# EAGLE board zulu_a7.c3s (EAGLE 9.7.0), part 1 of 3
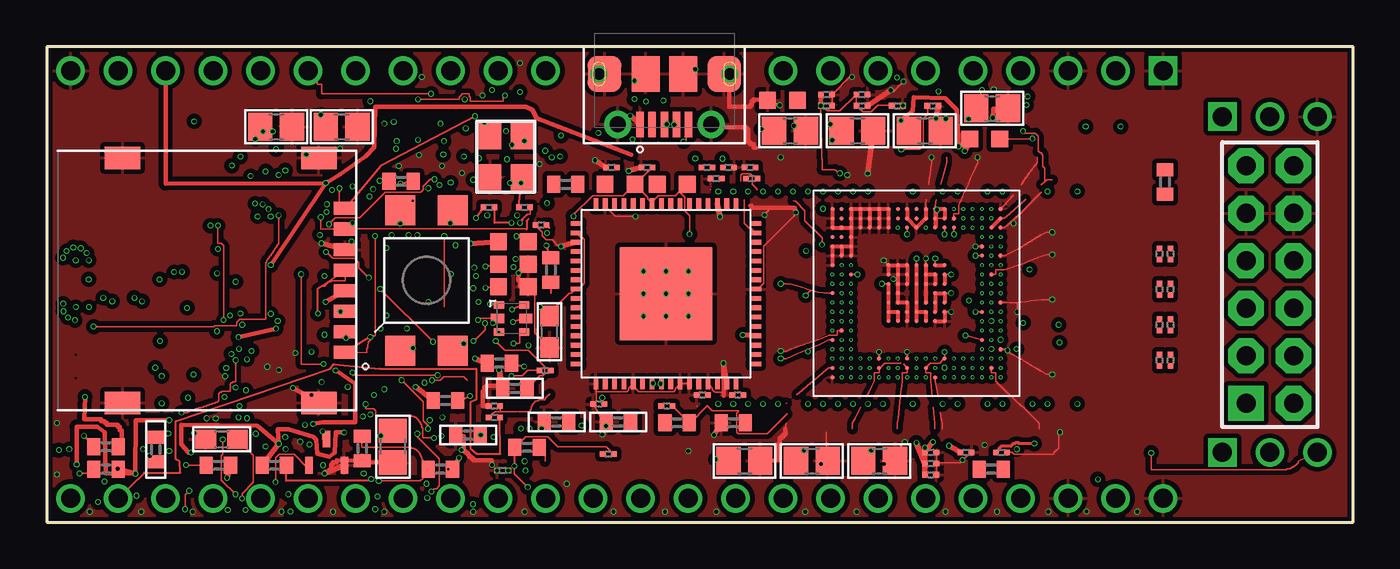
[diagram p0: board, top side]
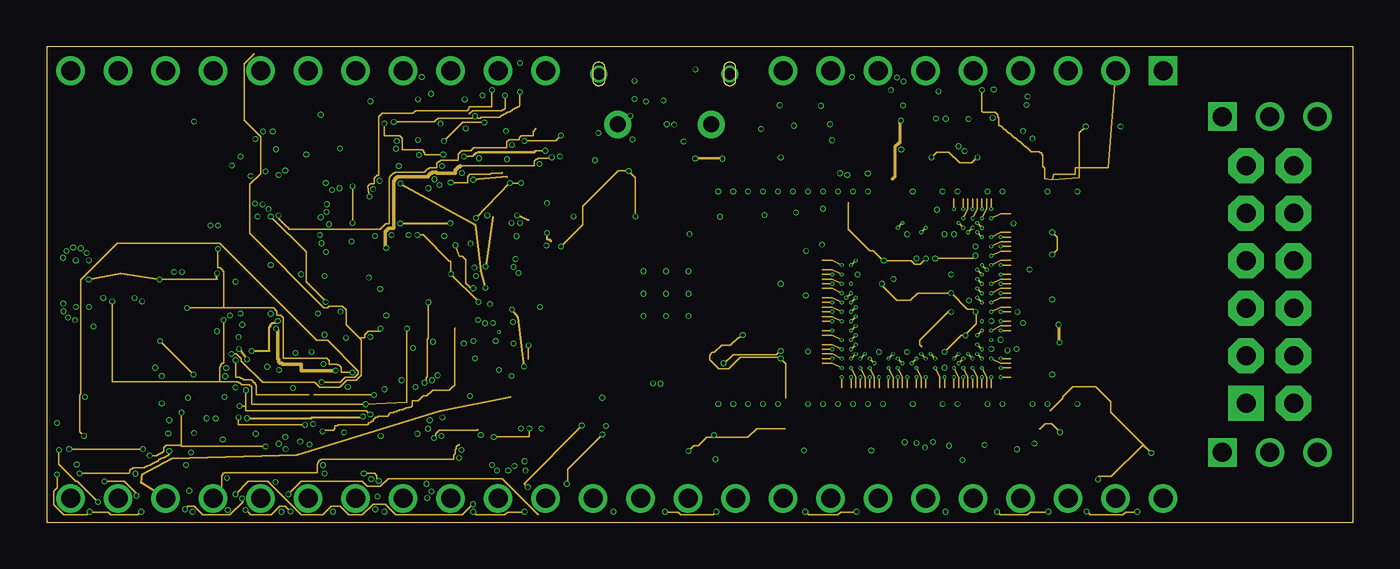
[diagram p1: board, inner layer Route2]
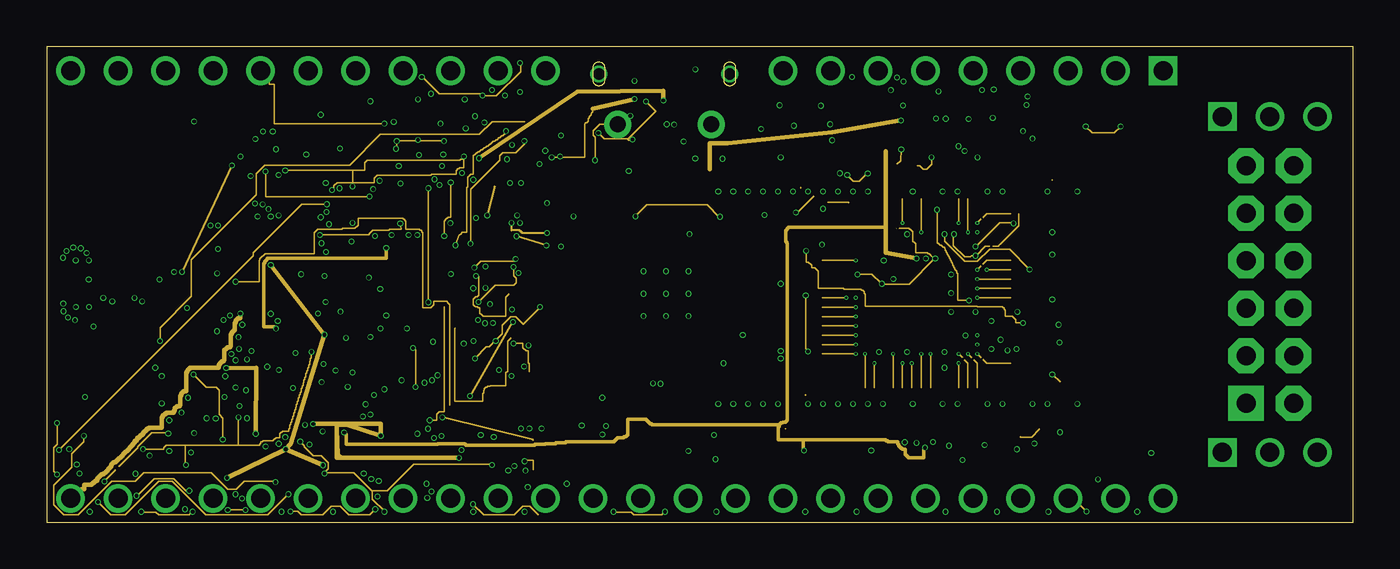
[diagram p2: board, inner layer Route3]
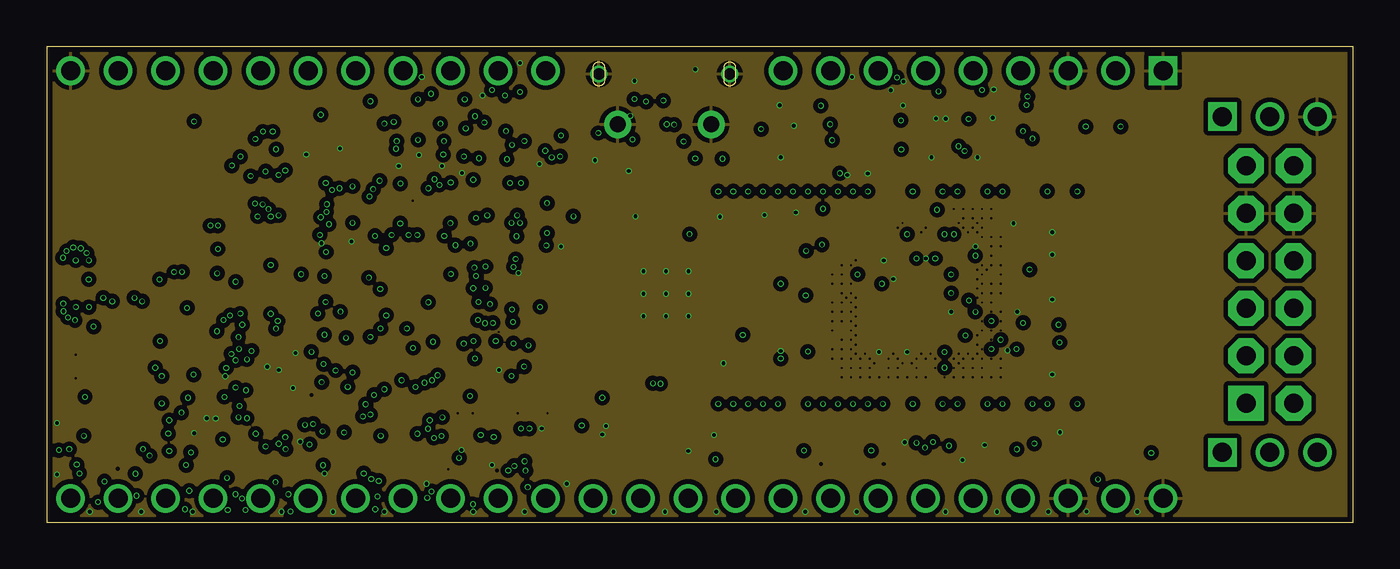
[diagram p3: board, inner layer Route4]
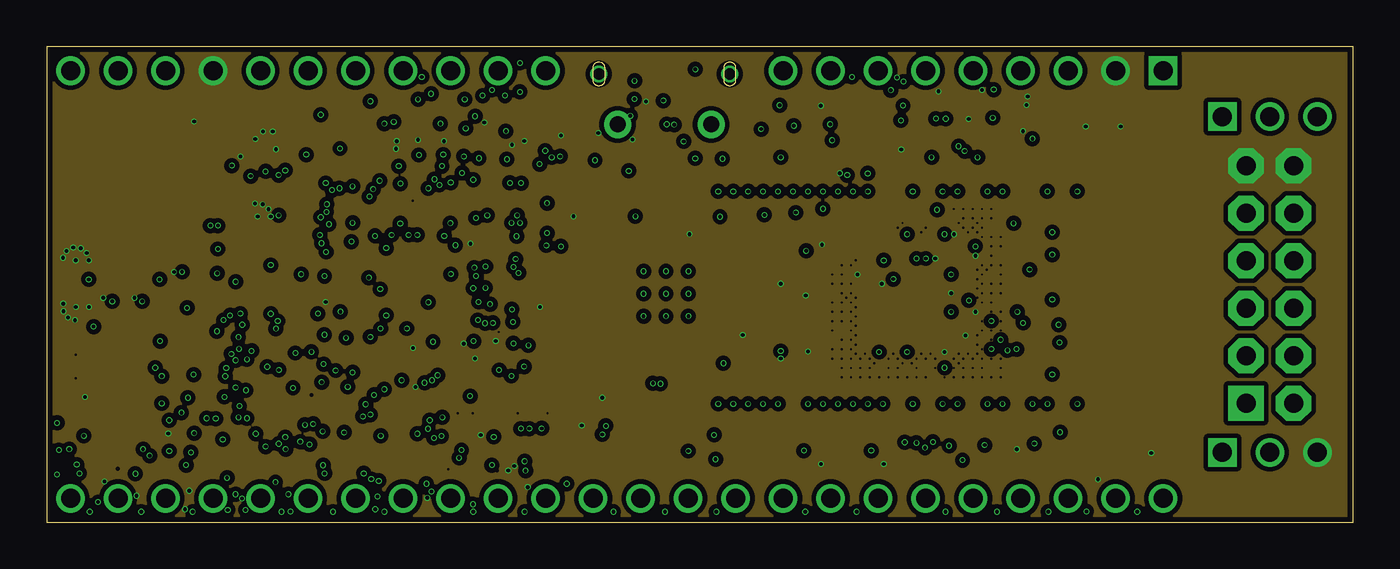
[diagram p4: board, inner layer Route5]
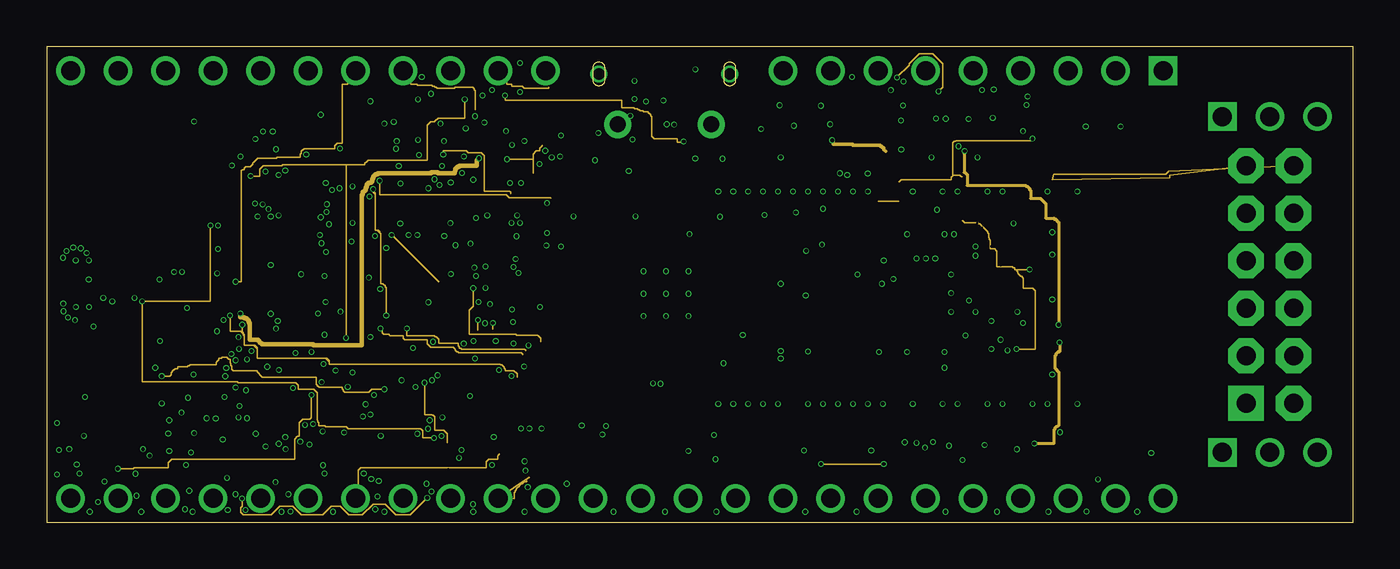
[diagram p5: board, inner layer Route6]
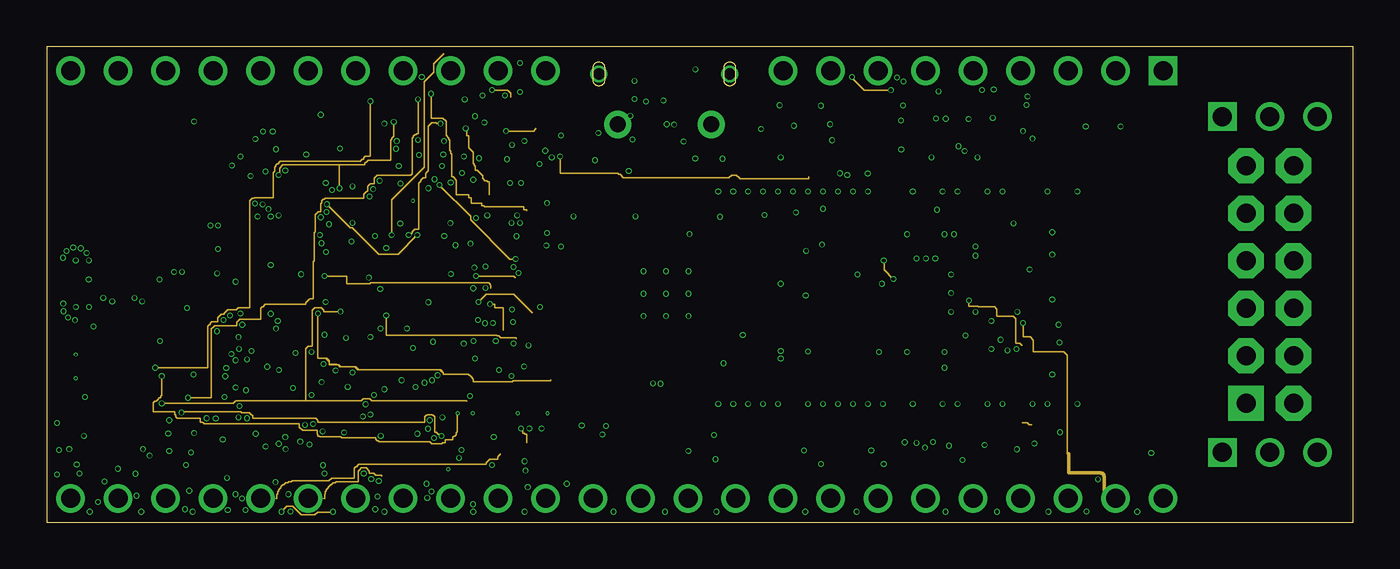
[diagram p6: board, inner layer Route7]
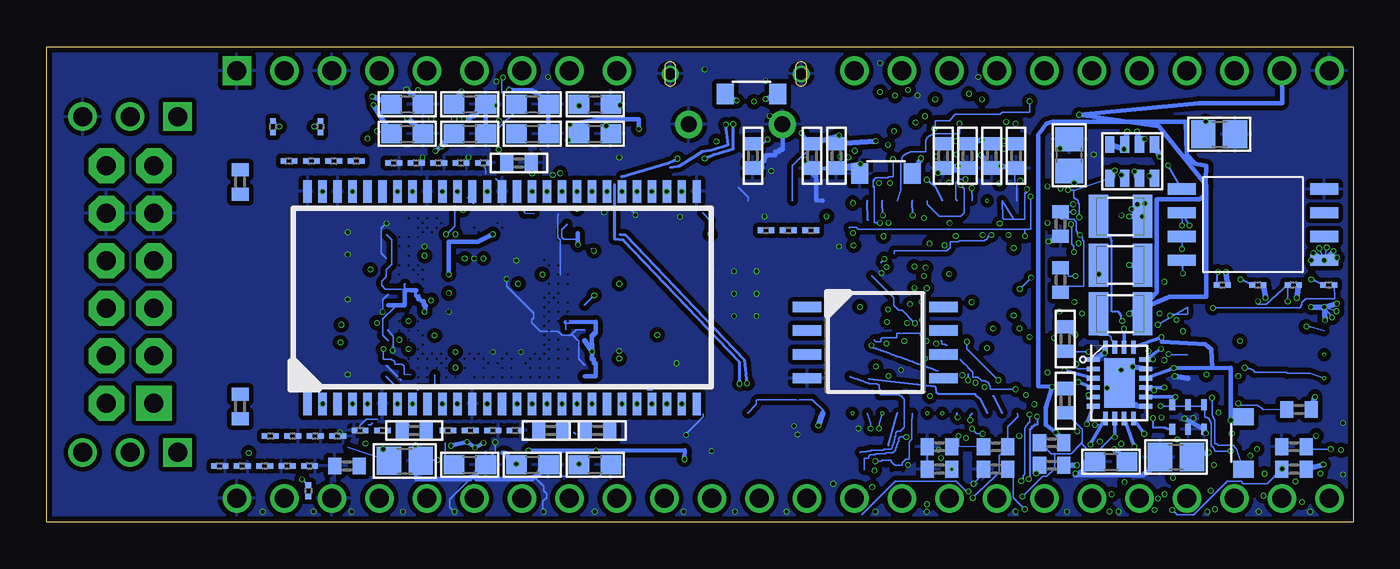
[diagram p7: board, bottom side, seen from below]

Size 69.85 x 25.4 mm. Coordinates in mm from the lower left corner, seen from the top.
Outline: 0,0 69.85,0 69.85,25.4 0,25.4 0,0
Copper layers [3:1+2+((3*4)+(5*6))+7+16:7]: Top / Route2 / Route3 / Route4 / Route5 / Route6 / Route7 / Bottom
Stack-up Default Layer Stack: Top User Defined 0.035mm / Dielectric-1 User Defined 0.12mm / Route2 User Defined 0.018mm / Dielectric-2 User Defined 0.2mm / Route3 User Defined 0.018mm / Dielectric-3 User Defined 0.25mm / Route4 User Defined 0.018mm / Dielectric-4 User Defined 0.282mm / Route5 User Defined 0.018mm / Dielectric-5 User Defined 0.25mm / Route6 User Defined 0.018mm / Dielectric-6 User Defined 0.2mm / Route7 User Defined 0.018mm / Dielectric-7 User Defined 0.12mm / Bottom User Defined 0.035mm
Design rules: minimum copper width class=2 0.15mm, minimum copper width 3mil, minimum drill size 0.1mm, copper clearance class=1 to class=1 10mil, copper clearance class=2 to class=2 3mil, copper clearance class=0 to class=0 3mil, copper clearance wire_polygon to wire_polygon 3mil, copper clearance wire_polygon to pad_smd 3mil, copper clearance wire_polygon to via 3mil, copper clearance pad_smd to pad_smd 3mil, copper clearance pad_smd to via 3mil, copper clearance via to via 3mil, copper clearance smd to pad (same net) 3mil, copper clearance smd to smd (same net) 3mil, copper clearance smd to via (same net) 0mil, dimension clearance 0.3mm, via restrict clearance 0mil, restrict clearance 0mil, drill distance 0.2mm, keepout clearance 0mil
Net classes: 0 default: clearance 0.076 mm; 1 power: clearance 0.254 mm; 2 usb-diff: width 0.15 mm, clearance 0.076 mm

## Footprints (pad centres in the part's own frame; a part is rotated, then mirrored left to right if it is on the bottom)
PTA-142 = smd 1.6 x 1.6: 1 -3.75,1.4; 2 -3.75,-1.4; 3 3.75,-1.4; 4 3.75,1.4
C0402 = smd 0.7 x 0.9: 1 -0.65,0; 2 0.65,0
C0603 = smd 1.1 x 1: 1 -0.85,0; 2 0.85,0
C0201 = smd 0.3 x 0.3: 1 -0.3,0; 2 0.3,0
C0805 = smd 1.3 x 1.5: 1 -0.85,0; 2 0.85,0
SOD123 = smd 0.9 x 1.1: A -1.4,0; K 1.4,0
2X06 = drill 1.016 pad 1.88 square: 1 -6.35,1.27 | drill 1.016 pad 1.88 octagon: 2 -3.81,1.27; 3 -1.27,1.27; 4 1.27,1.27; 5 3.81,1.27; 6 6.35,1.27; 7 -6.35,-1.27; 8 -3.81,-1.27; 9 -1.27,-1.27; 10 1.27,-1.27; 11 3.81,-1.27; 12 6.35,-1.27
1X03-NOSILK = drill 1.016 square: 1 -2.54,0 | drill 1.016: 2 0,0; 3 2.54,0
IND2520 = smd 1.05 x 2.3: 1 -1.175,0; 2 1.175,0
IND0603 = smd 0.9 x 0.9: 1 -0.8,0; 2 0.8,0
VS-NRD8 = smd 0.55 x 0.4: 1 -0.675,0.725; 3 -0.675,-0.725; 4 0.675,0.725; 6 0.675,-0.725 | smd 0.7 x 0.5: 2 -0.75,0; 5 0.75,0
LED0603 = smd 0.9 x 0.9: A -0.8,0; K 0.8,0
32X25 = smd 1.2 x 1.4: 1 0,0; 2 0,-2.2; 3 1.7,-2.2; 4 1.7,0
SOT23-3 = smd 0.4 x 0.9: D 0,0.7; G -0.95,-0.7; S 0.95,-0.7
SOT363 = smd 0.3 x 0.6: 1 -0.85,-0.65; 2 0,-0.65; 3 0.85,-0.65; 4 0.85,0.65; 5 0,0.65; 6 -0.85,0.65
R0201 = smd 0.3 x 0.3: 1 -0.3,0; 2 0.3,0
R0402 = smd 0.7 x 0.9: 1 -0.65,0; 2 0.65,0
742C083 = smd 0.5 x 0.9: 1 -0.4,-0.9; 2 0.4,-0.9; 3 1.2,-0.9; 4 2,-0.9; 5 2,0.9; 6 1.2,0.9; 7 0.4,0.9; 8 -0.4,0.9
XC7A35T-CPG236 = smd 0.225 x 0.225: A1 0,0; A2 0.5,0; A3 1,0; A4 1.5,0; A5 2,0; A6 2.5,0; A7 3,0; A8 3.5,0; A9 4,0; A10 4.5,0; A11 5,0; A12 5.5,0; A13 6,0; A14 6.5,0; A15 7,0; A16 7.5,0; A17 8,0; A18 8.5,0; A19 9,0; B1 0,-0.5; B2 0.5,-0.5; B3 1,-0.5; B4 1.5,-0.5; B5 2,-0.5; B6 2.5,-0.5; B7 3,-0.5; B8 3.5,-0.5; B9 4,-0.5; B10 4.5,-0.5; B11 5,-0.5; B12 5.5,-0.5; B13 6,-0.5; B14 6.5,-0.5; B15 7,-0.5; B16 7.5,-0.5; B17 8,-0.5; B18 8.5,-0.5; B19 9,-0.5; C1 0,-1; C2 0.5,-1; C3 1,-1; C4 1.5,-1; C5 2,-1; C6 2.5,-1; C7 3,-1; C8 3.5,-1; C9 4,-1; C10 4.5,-1; C11 5,-1; C12 5.5,-1; C13 6,-1; C14 6.5,-1; C15 7,-1; C16 7.5,-1; C17 8,-1; C18 8.5,-1; C19 9,-1; D1 0,-1.5; D2 0.5,-1.5; D3 1,-1.5; D17 8,-1.5; D18 8.5,-1.5; D19 9,-1.5; E1 0,-2; E2 0.5,-2; E3 1,-2; E17 8,-2; E18 8.5,-2; E19 9,-2; F1 0,-2.5; F2 0.5,-2.5; F3 1,-2.5; F17 8,-2.5; F18 8.5,-2.5; F19 9,-2.5; G1 0,-3; G2 0.5,-3; G3 1,-3; G7 3,-3; G8 3.5,-3; G9 4,-3; G10 4.5,-3; G11 5,-3; G12 5.5,-3; G13 6,-3; G17 8,-3; G18 8.5,-3; G19 9,-3; H1 0,-3.5; H2 0.5,-3.5; H3 1,-3.5; H7 3,-3.5; H8 3.5,-3.5; H9 4,-3.5; H10 4.5,-3.5; H11 5,-3.5; H12 5.5,-3.5; H13 6,-3.5; H17 8,-3.5; H18 8.5,-3.5; H19 9,-3.5; J1 0,-4; J2 0.5,-4; J3 1,-4; J7 3,-4; J8 3.5,-4; J9 4,-4; J10 4.5,-4; J11 5,-4; J12 5.5,-4; J13 6,-4; J17 8,-4; J18 8.5,-4; J19 9,-4; K1 0,-4.5; K2 0.5,-4.5; K3 1,-4.5; K7 3,-4.5; K8 3.5,-4.5; K12 5.5,-4.5; K13 6,-4.5; K17 8,-4.5; K18 8.5,-4.5; K19 9,-4.5; L1 0,-5; L2 0.5,-5; L3 1,-5; L7 3,-5; L8 3.5,-5; L9 4,-5; L10 4.5,-5; L11 5,-5; L12 5.5,-5; L13 6,-5; L17 8,-5; L18 8.5,-5; L19 9,-5; M1 0,-5.5; M2 0.5,-5.5; M3 1,-5.5; M7 3,-5.5; M8 3.5,-5.5; M9 4,-5.5; M10 4.5,-5.5; M11 5,-5.5; M12 5.5,-5.5; M13 6,-5.5; M17 8,-5.5; M18 8.5,-5.5; M19 9,-5.5; N1 0,-6; N2 0.5,-6; N3 1,-6; N7 3,-6; N8 3.5,-6; N9 4,-6; N10 4.5,-6; N11 5,-6; N12 5.5,-6; N13 6,-6; N17 8,-6; N18 8.5,-6; N19 9,-6; P1 0,-6.5; P2 0.5,-6.5; P3 1,-6.5; P17 8,-6.5; P18 8.5,-6.5; P19 9,-6.5; R1 0,-7; R2 0.5,-7; R3 1,-7; R17 8,-7; R18 8.5,-7; R19 9,-7; T1 0,-7.5; T2 0.5,-7.5; T3 1,-7.5; T17 8,-7.5; T18 8.5,-7.5; T19 9,-7.5; U1 0,-8; U2 0.5,-8; U3 1,-8; U4 1.5,-8; U5 2,-8; U6 2.5,-8; U7 3,-8; U8 3.5,-8; U9 4,-8; U10 4.5,-8; U11 5,-8; U12 5.5,-8; U13 6,-8; U14 6.5,-8; U15 7,-8; U16 7.5,-8; U17 8,-8; U18 8.5,-8; U19 9,-8; V1 0,-8.5; V2 0.5,-8.5; V3 1,-8.5; V4 1.5,-8.5; V5 2,-8.5; V6 2.5,-8.5; V7 3,-8.5; V8 3.5,-8.5; V9 4,-8.5; V10 4.5,-8.5; V11 5,-8.5; V12 5.5,-8.5; V13 6,-8.5; V14 6.5,-8.5; V15 7,-8.5; V16 7.5,-8.5; V17 8,-8.5; V18 8.5,-8.5; V19 9,-8.5; W1 0,-9; W2 0.5,-9; W3 1,-9; W4 1.5,-9; W5 2,-9; W6 2.5,-9; W7 3,-9; W8 3.5,-9; W9 4,-9; W10 4.5,-9; W11 5,-9; W12 5.5,-9; W13 6,-9; W14 6.5,-9; W15 7,-9; W16 7.5,-9; W17 8,-9; W18 8.5,-9; W19 9,-9
FT2232HQ-QFN64 = smd 0.25 x 0.6: 1 -3.75,-4.8; 2 -3.25,-4.8; 3 -2.75,-4.8; 4 -2.25,-4.8; 5 -1.75,-4.8; 6 -1.25,-4.8; 7 -0.75,-4.8; 8 -0.25,-4.8; 9 0.25,-4.8; 10 0.75,-4.8; 11 1.25,-4.8; 12 1.75,-4.8; 13 2.25,-4.8; 14 2.75,-4.8; 15 3.25,-4.8; 16 3.75,-4.8; 33 3.75,4.8; 34 3.25,4.8; 35 2.75,4.8; 36 2.25,4.8; 37 1.75,4.8; 38 1.25,4.8; 39 0.75,4.8; 40 0.25,4.8; 41 -0.25,4.8; 42 -0.75,4.8; 43 -1.25,4.8; 44 -1.75,4.8; 45 -2.25,4.8; 46 -2.75,4.8; 47 -3.25,4.8; 48 -3.75,4.8 | smd 0.6 x 0.25: 17 4.8,-3.75; 18 4.8,-3.25; 19 4.8,-2.75; 20 4.8,-2.25; 21 4.8,-1.75; 22 4.8,-1.25; 23 4.8,-0.75; 24 4.8,-0.25; 25 4.8,0.25; 26 4.8,0.75; 27 4.8,1.25; 28 4.8,1.75; 29 4.8,2.25; 30 4.8,2.75; 31 4.8,3.25; 32 4.8,3.75; 49 -4.8,3.75; 50 -4.8,3.25; 51 -4.8,2.75; 52 -4.8,2.25; 53 -4.8,1.75; 54 -4.8,1.25; 55 -4.8,0.75; 56 -4.8,0.25; 57 -4.8,-0.25; 58 -4.8,-0.75; 59 -4.8,-1.25; 60 -4.8,-1.75; 61 -4.8,-2.25; 62 -4.8,-2.75; 63 -4.8,-3.25; 64 -4.8,-3.75 | smd 4.95 x 4.95: EP 0,0
TSOPII-54 = smd 1.2 x 0.45: 1 0,0; 2 0,-0.8; 3 0,-1.6; 4 0,-2.4; 5 0,-3.2; 6 0,-4; 7 0,-4.8; 8 0,-5.6; 9 0,-6.4; 10 0,-7.2; 11 0,-8; 12 0,-8.8; 13 0,-9.6; 14 0,-10.4; 15 0,-11.2; 16 0,-12; 17 0,-12.8; 18 0,-13.6; 19 0,-14.4; 20 0,-15.2; 21 0,-16; 22 0,-16.8; 23 0,-17.6; 24 0,-18.4; 25 0,-19.2; 26 0,-20; 27 0,-20.8; 28 11.36,-20.8; 29 11.36,-20; 30 11.36,-19.2; 31 11.36,-18.4; 32 11.36,-17.6; 33 11.36,-16.8; 34 11.36,-16; 35 11.36,-15.2; 36 11.36,-14.4; 37 11.36,-13.6; 38 11.36,-12.8; 39 11.36,-12; 40 11.36,-11.2; 41 11.36,-10.4; 42 11.36,-9.6; 43 11.36,-8.8; 44 11.36,-8; 45 11.36,-7.2; 46 11.36,-6.4; 47 11.36,-5.6; 48 11.36,-4.8; 49 11.36,-4; 50 11.36,-3.2; 51 11.36,-2.4; 52 11.36,-1.6; 53 11.36,-0.8; 54 11.36,0
SOIC-8_208MIL = smd 1.51 x 0.56: 1 0.299,0; 2 0.299,-1.27; 3 0.299,-2.54; 4 0.299,-3.81; 5 7.599,-3.81; 6 7.599,-2.54; 7 7.599,-1.27; 8 7.599,0
LTC3569-QFN20 = smd 0.7 x 0.25: 1 -1.4,1.25; 2 -1.4,0.75; 3 -1.4,0.25; 4 -1.4,-0.25; 5 -1.4,-0.75; 6 -1.4,-1.25; 11 1.4,-1.25; 12 1.4,-0.75; 13 1.4,-0.25; 14 1.4,0.25; 15 1.4,0.75; 16 1.4,1.25 | smd 0.25 x 0.7: 7 -0.75,-1.9; 8 -0.25,-1.9; 9 0.25,-1.9; 10 0.75,-1.9; 17 0.75,1.9; 18 0.25,1.9; 19 -0.25,1.9; 20 -0.75,1.9 | smd 1.65 x 2.65: 21 0,0
SOIC8 = smd 1.5 x 0.6: 1 -3.81,1.905; 2 -3.81,0.635; 3 -3.81,-0.635; 4 -3.81,-1.905; 5 3.81,1.905; 6 3.81,0.635; 7 3.81,-0.635; 8 3.81,-1.905
MOLEX-105017-0001 = smd 0.4 x 1.35: 1 1.3,0; 2 0.65,0; 3 0,0; 4 -0.65,0; 5 -1.3,0 | drill 0.85 pad 1.45: MH1 -2.5,0; MH2 2.5,0 | smd 1.8 x 1.9: MP1 -3.2,2.7; MP4 3.2,2.7 | smd 1.5 x 1.9: MP2 -1,2.7; MP3 1,2.7 | drill 0.6 pad 0.9: MS1 -3.5,2.7; MS2 3.5,2.7
ZULU-DIP37 = drill 1.016 square: 1 59.69,24.13 | drill 1.016: 2 57.15,24.13; 3 54.61,24.13; 4 52.07,24.13; 5 49.53,24.13; 6 46.99,24.13; 7 44.45,24.13; 8 41.91,24.13; 9 39.37,24.13; 10 26.67,24.13; 11 24.13,24.13; 12 21.59,24.13; 13 19.05,24.13; 14 16.51,24.13; 15 13.97,24.13; 16 11.43,24.13; 17 8.89,24.13; 18 6.35,24.13; 19 3.81,24.13; 20 1.27,24.13; 21 59.69,1.27; 22 57.15,1.27; 23 54.61,1.27; 24 52.07,1.27; 25 49.53,1.27; 26 46.99,1.27; 27 44.45,1.27; 28 41.91,1.27; 29 39.37,1.27; 30 36.83,1.27; 31 34.29,1.27; 32 31.75,1.27; 33 29.21,1.27; 34 26.67,1.27; 35 24.13,1.27; 36 21.59,1.27; 37 19.05,1.27; 38 16.51,1.27; 39 13.97,1.27; 40 11.43,1.27; 41 8.89,1.27; 42 6.35,1.27; 43 3.81,1.27; 44 1.27,1.27
DM3AT-SF-PEJM5 = smd 0.7 x 1.2: 1 3.85,0; 2 2.75,0; 3 1.65,0; 4 0.55,0; 5 -0.55,0; 6 -1.65,0; 7 -2.75,0; 8 -3.85,0 | smd 1.2 x 1.9: G1 -6.55,-1.4; G2 6.55,-1.4; G3 -6.55,-11.9; G4 6.55,-11.9

## Placement (x,y rotation side)
BTN  PTA-142  [PTA-142]  20.3,12.92 90 top
C3  0.1uF  [C0402]  25.02,7.15 0 top
C4  0.1uF  [C0402]  22.52,4.65 0 top
C5  0.1uF  [C0402]  18.02,19.58 90 bottom
C6  0.1uF  [C0402]  19.32,19.58 90 bottom
C7  0.1uF  [C0402]  20.62,19.58 90 bottom
C8  0.1uF  [C0402]  21.93,19.58 90 bottom
C9  0.1uF  [C0402]  27.63,19.58 90 bottom
C11  0.1uF  [C0402]  28.93,19.58 90 bottom
C12  0.1uF  [C0402]  32.09,19.58 90 bottom
C13  10uF  [C0603]  26.89,10.17 90 top
C36  1nF  [C0402]  40.4,4.9 0 bottom
C37  1nF  [C0402]  42.9,4.9 0 bottom
C38  0.01uF  [C0201]  32.09,18.96 0 top
C39  3.3uF  [C0402]  30.56,5.36 0 top
C40  100nF  [C0201]  37.6,18.96 0 top
C41  100nF  [C0201]  30.19,18.96 0 top
C78  22uF 10V  [C0805]  18.51,4.03 90 top
C79  20pF  [C0402]  15.4,6.49 90 bottom
C80  22uF  [C0805]  9.48,3.48 0 bottom
C81  20pF  [C0402]  15.4,9.79 90 bottom
C82  10uF  [C0603]  12.95,3.23 0 bottom
C83  20pF  [C0402]  5.83,3.88 90 top
C84  10uF  [C0603]  9.35,4.42 0 top
C85  22uF  [C0805]  37.3,3.27 0 top
C86  22uF  [C0805]  15.77,21.13 0 top
C87  4.7uF  [C0603]  40.53,20.77 0 bottom
C88  4.7uF  [C0603]  43.88,20.77 0 bottom
C89  0.47uF  [C0201]  47.25,2.53 0 top
C90  0.47uF  [C0201]  47.25,3.13 0 top
C91  0.47uF  [C0201]  47.25,3.73 0 top
C92  0.47uF  [C0201]  49.15,3.73 0 top
C93  22uF  [C0805]  15.18,19.62 90 bottom
C94  4.7uF  [C0603]  47.23,20.77 0 bottom
C95  0.47uF  [C0201]  51.05,3.73 0 top
C96  0.47uF  [C0201]  36.45,18.96 0 top
C97  22uF  [C0805]  12.27,21.13 0 top
C98  22uF  [C0805]  7.17,20.73 0 bottom
C99  4.7uF  [C0603]  50.58,20.77 0 bottom
C100  4.7uF  [C0603]  40.53,22.34 0 bottom
C101  4.7uF  [C0603]  43.88,22.34 0 bottom
C102  4.7uF  [C0603]  47.23,22.34 0 bottom
C103  4.7uF  [C0603]  50.58,22.34 0 bottom
C104  4.7uF  [C0603]  40.53,3.06 0 bottom
C105  4.7uF  [C0603]  43.88,3.06 0 bottom
C106  4.7uF  [C0603]  47.23,3.06 0 bottom
C107  0.47uF  [C0201]  47.7,19.2 0 bottom
C108  0.47uF  [C0201]  46.5,19.2 0 bottom
C109  0.47uF  [C0201]  56.7,4.6 0 bottom
C110  0.47uF  [C0201]  59.4,3 0 bottom
C111  0.47uF  [C0201]  54.3,4.6 0 bottom
C112  0.47uF  [C0201]  60.6,3 0 bottom
C113  0.47uF  [C0201]  48.9,19.2 0 bottom
C114  0.47uF  [C0201]  55.5,4.6 0 bottom
C115  0.47uF  [C0201]  50.1,19.2 0 bottom
C116  0.47uF  [C0201]  51.3,19.2 0 bottom
C117  0.47uF  [C0201]  41.69,22.26 0 top
C118  0.47uF  [C0201]  43.58,22.26 0 top
C119  0.47uF  [C0201]  45.48,22.26 0 top
C120  0.47uF  [C0201]  47.37,22.26 0 top
C121  0.47uF  [C0201]  41.69,22.86 0 top
C122  0.47uF  [C0201]  43.58,22.86 0 top
C123  100nF  [C0402]  50.2,4.9 0 bottom
C124  470nF  [C0402]  44.6,19.2 0 bottom
C133  0.1uF  [C0201]  35.05,6.8 0 top
C134  0.1uF  [C0201]  36.95,6.8 0 top
C135  0.1uF  [C0201]  24.37,2.76 0 top
C136  0.1uF  [C0201]  29.52,6.31 0 top
C137  0.1uF  [C0201]  35.79,18.36 0 top
C138  0.1uF  [C0201]  37.69,18.36 0 top
C139  3.3uF  [C0402]  27.26,5.36 0 top
C140  22uF  [C0805]  40.9,3.27 0 top
C141  22uF  [C0805]  44.51,3.27 0 top
C142  22uF  [C0805]  39.74,20.92 0 top
C143  22uF  [C0805]  43.34,20.92 0 top
C144  22uF  [C0805]  46.94,20.92 0 top
C145  22uF  [C0805]  50.55,22.12 0 top
C146  22uF  [C0805]  50.7,3.27 0 bottom
D1  PMEG2020EJ,115  [SOD123]  5.88,4.23 90 bottom
D2  PMEG2020EJ,115  [SOD123]  32.17,22.88 0 bottom
D3  SMF5.0A  [SOD123]  24.98,18.63 0 bottom
J1  Pmod 2x6  [2X06]  65.39,12.7 90 top
JP3  JTAG TCK/TMS/GND  [1X03-NOSILK]  65.39,21.68 0 top
JP4  JTAG TDI/TDO/3V3  [1X03-NOSILK]  65.39,3.72 0 top
L1  1.5uH  [IND2520]  12.45,11.14 0 bottom
L2  3.3uH  [IND2520]  12.45,13.74 0 bottom
L3  2.2uH  [IND2520]  12.45,16.34 0 bottom
L4  FB 600R@100MHz  [IND0603]  30.65,18.06 0 top
L5  FB 600R@100MHz  [IND0603]  33.45,18.06 0 top
L6  FB 600R@100MHz  [IND0603]  39.34,22.56 0 top
L7  FB 600R@100MHz  [IND0603]  50.14,20.48 0 top
LD0  VS NRD8  [VS-NRD8]  24.85,10.88 0 top
LD1  red  [LED0603]  24.95,12.59 0 top
LD2  red  [LED0603]  24.95,13.79 0 top
LD5  green  [LED0603]  24.95,14.98 0 top
Q1  12MHz 25ppm (FPGA + FT2232HQ)  [32X25]  23.7,20.63 0 top
Q2  2N7002  [SOT23-3]  14.97,3.74 0 top
Q3  MBT3904DW1T1  [SOT363]  8.82,5.62 0 bottom
R1  4.7K  [R0201]  58.2,3 0 bottom
R2  4.7K  [R0201]  29,15.6 0 bottom
R3  4.7K  [R0201]  55.8,3 0 bottom
R4  100  [R0402]  59.79,18.18 90 top
R5  5.1K  [R0201]  57,3 0 bottom
R6  4.7K  [R0201]  30.2,15.6 0 bottom
R7  4.7K  [R0201]  31.4,15.6 0 bottom
R8  100  [R0402]  59.51,6.18 90 bottom
R9  100  [R0201]  53.3,19.3 0 bottom
R10  2.32K  [R0201]  26.64,8.1 0 top
R11  1K  [R0201]  26.43,15.88 0 top
R12  140  [R0201]  48.4,4.9 0 bottom
R13  845  [R0201]  44.8,4.9 0 bottom
R14  2.32K  [R0201]  23.93,5.6 0 top
R15  1K  [R0201]  23.93,6.2 0 top
R16  140  [R0201]  47.2,4.9 0 bottom
R17  845  [R0201]  46,4.9 0 bottom
R18  12K 1%  [R0402]  36.7,5.31 0 top
R19  10K  [R0201]  35.3,18.96 0 top
R20  1K  [R0201]  51.9,4.9 0 bottom
R21  1K  [R0402]  53.8,3 0 bottom
R22  1K  [R0201]  53.1,4.9 0 bottom
R23  1K  [R0201]  57.9,4.6 0 bottom
R24  33  [R0201]  23.65,16.83 0 top
R25  33  [R0201]  25.54,16.83 0 top
R26  200  [R0201]  59.49,8.65 90 top
R27  200  [R0201]  60.09,8.65 90 top
R28  200  [R0201]  59.49,10.54 90 top
R29  200  [R0201]  60.09,10.54 90 top
R30  200  [R0201]  59.49,12.44 90 top
R31  200  [R0201]  60.09,12.44 90 top
R32  200  [R0201]  59.49,14.34 90 top
R33  200  [R0201]  60.09,14.34 90 top
R34  4.7K  [742C083]  12.62,19.29 0 bottom
R35  4.7K  [R0402]  2.9,6.02 0 bottom
R36  100  [R0402]  59.51,18.18 90 bottom
R37  100  [R0402]  50.5,2.83 0 top
R38  100  [R0201]  54.5,19.3 0 bottom
R65  30K 1%  [R0402]  16.12,4.24 0 bottom
R66  120K 1%  [R0402]  22.11,2.83 0 bottom
R67  3.48K 1%  [R0402]  16.12,3.04 0 bottom
R68  150K 1%  [R0402]  9.17,3.04 0 top
R69  120K 1%  [R0402]  3.17,4.03 0 bottom
R70  10K 1%  [R0402]  16.87,3.94 90 top
R71  180K 1%  [R0402]  19.12,4.03 0 bottom
R72  0 (No Load, DNP)  [R0402]  3.17,2.83 0 bottom
R73  57.6K 1%  [R0402]  22.11,4.03 0 bottom
R74  100K  [R0402]  19.12,2.83 0 bottom
R75  100K  [R0402]  3.17,2.83 0 top
R76  100K  [R0402]  21.04,2.83 0 top
R77  100K  [R0402]  3.17,4.03 0 top
R78  680  [R0402]  26.95,13.48 90 top
R79  1K  [R0402]  12.17,3.04 0 top
R80  33  [R0402]  24.2,8.5 0 top
R81  330  [R0402]  21.32,6.5 0 top
R82  33  [R0402]  25.67,4 0 top
R83  330  [R0402]  18.95,18.22 0 top
R84  330  [R0402]  27.75,18.06 0 top
R85  10K  [R0402]  15.65,12.94 90 bottom
R86  10K  [R0402]  15.65,15.93 90 bottom
R89  10K  [R0201]  55.22,21.14 90 bottom
R90  10K  [R0201]  55.87,1.67 90 bottom
R91  10K  [R0201]  30.02,3.63 0 top
R92  10K  [R0201]  57.76,21.14 90 bottom
R93  10K  [R0201]  56.9,19.3 0 bottom
R94  10K  [R0201]  55.7,19.3 0 bottom
R96  10k  [R0201]  3.2,12.68 0 bottom
R97  10k  [R0201]  5.1,12.68 0 bottom
R98  10k  [R0201]  7,12.68 0 bottom
R99  4.7k  [R0201]  33.16,6.21 0 top
R100  330  [R0402]  33.71,5.31 0 top
R101  2.21k  [R0201]  1.31,12.68 0 bottom
U1  XC7A35T-1CPG236C  [XC7A35T-CPG236]  42,16.74 0 top
U2  FT2232HQ USB-UART/JTAG Bridge  [FT2232HQ-QFN64]  33.11,12.21 0 top
U3  AS4C32M16SB-6TIN  [TSOPII-54]  55.9,6.32 90 bottom
U4  W25Q128JVSIQ  [SOIC-8_208MIL]  29.5,11.5 0 bottom
U8  LTC3569EUDC#TRPBF  [LTC3569-QFN20]  12.5,7.44 0 bottom
U10  93LC46BT-I/SN  [SOIC8]  5.36,15.9 0 bottom
U$2  [CC_CC]  5.06,-6.44 0 top  (outside the outline)
U$3  [CC_BY]  10.89,-7.72 0 top  (outside the outline)
U$4  [CC_SA]  15.45,-7.72 0 top  (outside the outline)
U$5  [CC_COPYRIGHT]  21.29,-6.44 0 top  (outside the outline)
X1  Molex 105017-0001 Micro-USB-B  [MOLEX-105017-0001]  33.02,21.26 0 top
X2  [ZULU-DIP37]  0,0 0 top
X3  [DM3AT-SF-PEJM5]  15.95,12.92 270 top

## Library data of the parts
BTN D1-D3 J1 L1-L7 LD0 LD1 LD2 LD5 Q1-Q3 R34 U1-U4 U8 U10 U$2-U$5 X1-X3 = ctambe
C3-C9 C11-C13 C36-C41 C78-C124 C133-C146 R1-R33 R35-R38 R65-R86 R89-R94 R96-R101 = rcl
JP3 JP4 = pinhead

## Nets
A0: U1.U2 U3.23
A1: U1.T3 U3.24
A2: U1.T2 U3.25
A3: U1.T1 U3.26
A4: U1.R3 U3.29
A5: U1.R2 U3.30
A6: U1.P3 U3.31
A7: U1.P1 U3.32
A8: U1.N3 U3.33
A9: U1.N2 U3.34
A10: U1.U3 U3.22
A11: U1.N1 U3.35
A12: U1.M3 U3.36
AIN15_N: C36.1 R13.1 U1.G2
AIN15_P: C36.2 R12.1 U1.G3
AIN16_N: C37.1 R17.1 U1.J2
AIN16_P: C37.2 R16.1 U1.H2
ANALOG-IO0: R10.2 X2.42
ANALOG-IO1: R14.2 X2.43
BS0: U1.V2 U3.20
BS1: U1.U1 U3.21
BTN: R85.2 U1.N17
CAS#: U1.W3 U3.17
CFG-M0: R20.1 U1.V12
CFG-M1: R21.2 U1.W11
CFG-M2: R22.2 U1.U10
CHAN0: U1.B18 X2.5
CHAN1: U1.A18 X2.6
CHAN2: U1.B17 X2.7
CHAN3: U1.A17 X2.8
CHAN4: U1.C16 X2.9
CHAN5: U1.D17 X2.10
CHAN6: U1.H17 X2.11
CHAN7: U1.H19 X2.12
CHAN8: U1.J18 X2.13
CHAN9: U1.J17 X2.14
CHAN10: U1.J19 X2.15
CHAN11: U1.K17 X2.16
CHAN12: U1.W19 X2.25
CHAN13: U1.W18 X2.26
CHAN14: U1.W17 X2.27
CHAN15: U1.V17 X2.28
CHAN16: U1.W16 X2.29
CHAN17: U1.U16 X2.30
CHAN18: U1.V16 X2.31
CHAN19: U1.W15 X2.32
CHAN20: U1.V15 X2.33
CHAN21: U1.U15 X2.34
CHAN22: U1.W14 X2.35
CHAN23: U1.V14 X2.36
CHAN24: U1.U14 X2.37
CHAN25: U1.W13 X2.38
CHAN26: U1.V13 X2.39
CHAN27: U1.T18 X2.40
CHAN28: U1.R19 X2.41
CHAN-CLK: U1.P18 X2.4
CKE: U1.M2 U3.37
CLK-12M-FPGA: R25.2 U1.L17
CLK-12M-FT: R24.2 U2.2
CLK-12M-SHARED: Q1.3 R24.1 R25.1
D0: U1.V8 U3.2
D1: U1.V7 U3.4
D2: U1.W7 U3.5
D3: U1.W6 U3.7
D4: U1.U5 U3.8
D5: U1.W5 U3.10
D6: U1.V5 U3.11
D7: U1.U4 U3.13
D8: U1.L1 U3.42
D9: U1.K3 U3.44
D10: U1.K2 U3.45
D11: U1.J1 U3.47
D12: U1.J3 U3.48
D13: U1.H1 U3.50
D14: U1.A14 U3.51
D15: U1.A15 U3.53
DONE: R38.1 R100.1 U2.22
EE-CLK: R96.1 U2.62 U10.2
EE-CS: R98.1 U2.63 U10.1
EE-DATA: R101.2 U2.61 U10.3
EE-DATA-DO: R97.1 R101.1 U10.4
EN_BIAS: Q3.4 Q3.5 Q3.6 R67.1 R70.2 R75.1 R76.1 U8.12 U8.13
FB1_NODE: C79.1 R65.1 R66.2 U8.8
FB2_NODE: C81.1 R68.1 R69.2 U8.7
FB3_NODE: C83.1 R71.1 R73.2 U8.9
FLASH-CS#: R7.1 U1.K19 U4.1
FLASH-D00: U1.D18 U4.5
FLASH-D01: U1.D19 U4.2
FLASH-D02: R2.1 U1.G18 U4.3
FLASH-D03: R6.1 U1.F18 U4.7
FPGA-CCLK: U1.C11 U4.6
FPGA-DONE: R38.2 U1.U12
FPGA-INIT#: R1.1 U1.U11
FPGA-TCK: R5.2 R36.2 U1.C8
FPGA-TDI: R8.2 U1.W10
FPGA-TDO: R37.2 U1.W8
FPGA-TMS: R4.2 U1.W9
FT-PWREN#: U1.P17 U2.60
FT-REF: R18.2 U2.6
FT-RESETN: R19.1 U2.14
FT-VCORE: C39.2 C139.2 U2.12 U2.37 U2.49 U2.64
FT-VPHY: C40.2 L4.1 U2.4
FT-VPLL: C41.2 L5.1 U2.9
GND: C3.1 C4.1 C5.1 C6.1 C7.1 C8.1 C9.1 C11.1 C12.1 C13.1 C38.1 C39.1 C40.1 C41.1 C78.1 C80.1 C82.1 C84.1 C85.2 C86.2 C87.2 C88.2 C89.2 C90.2 C91.2 C92.2 C93.2 C94.2 C95.2 C96.2 C97.2 C98.2 C99.2 C100.2 C101.2 C102.2 C103.2 C104.2 C105.2 C106.2 C107.2 C108.2 C109.2 C110.2 C111.2 C112.2 C113.2 C114.2 C115.2 C116.2 C117.2 C118.2 C119.2 C120.2 C121.2 C122.2 C124.2 C133.1 C134.1 C135.1 C136.1 C137.1 C138.1 C139.1 C140.2 C141.2 C142.2 C143.2 C144.2 C145.2 C146.2 D3.A J1.5 J1.11 JP3.3 L6.1 LD1.K LD2.K Q1.2 Q2.S Q3.2 Q3.3 R3.2 R5.1 R11.1 R13.2 R15.1 R17.2 R18.1 R21.1 R22.1 R66.1 R69.1 R70.1 R73.1 R74.1 R86.1 U1.A1 U1.A3 U1.A4 U1.A5 U1.A6 U1.A7 U1.A9 U1.A11 U1.A19 U1.B1 U1.B3 U1.B4 U1.B5 U1.B6 U1.B7 U1.B9 U1.B11 U1.B14 U1.C1 U1.C2 U1.C3 U1.C4 U1.C5 U1.C6 U1.C7 U1.C10 U1.C19 U1.D3 U1.E1 U1.E2 U1.E3 U1.E17 U1.F1 U1.F2 U1.F3 U1.F19 U1.G1 U1.G7 U1.G8 U1.G9 U1.G11 U1.H7 U1.H8 U1.H9 U1.H11 U1.H12 U1.H18 U1.J8 U1.J9 U1.J11 U1.J12 U1.K8 U1.L8 U1.L9 U1.L11 U1.L19 U1.M9 U1.M13 U1.N9 U1.N12 U1.N13 U1.P2 U1.T19 U1.U6 U1.U9 U1.V18 U1.W1 U1.W12 U2.1 U2.5 U2.10 U2.11 U2.13 U2.15 U2.25 U2.35 U2.47 U2.51 U2.EP U3.6 U3.12 U3.28 U3.41 U3.46 U3.52 U3.54 U4.4 U8.1 U8.11 U8.15 U8.20 U8.21 U10.5 X1.5 X1.MH1 X1.MH2 X1.MP1 X1.MP2 X1.MP3 X1.MP4 X1.MS1 X1.MS2 X2.1 X2.3 X2.20 X2.21 X2.23 X3.6 X3.G1 X3.G2 X3.G3 X3.G4
GNDADC: C123.2 L6.2 U1.A12 U1.A13 U1.B12 U1.B13 U1.C12
JA1: R26.1 U1.U18
JA2: R27.1 U1.U19
JA3: R28.1 U1.G17
JA4: R29.1 U1.C17
JA7: R30.2 U1.T17
JA8: R31.2 U1.E19
JA9: R32.2 U1.V19
JA10: R33.2 U1.U17
LD5_K: LD5.K R78.2
LD5_TO_Q2: Q2.D R78.1
LDQM: U1.W4 U3.15
LED0_B: LD0.1 U1.N19
LED0_G: LD0.3 U1.R18
LED0_R: LD0.2 U1.P19
LED1: R83.1 U1.N18
LED2: R84.1 U1.M19
MODE_NET: R72.1 R74.2 U8.5
N$BTN: BTN.3 BTN.4 R85.1 R86.2
N$LD0B: LD0.4 R80.2
N$LD0G: LD0.6 R82.2
N$LD0R: LD0.5 R81.2
N$LD1A: LD1.A R83.2
N$LD2A: LD2.A R84.2
NODE_P0: R10.1 R11.2 R12.2
NODE_P1: R14.1 R15.2 R16.2
PGOOD: Q2.G R77.1 U8.4
PMOD-1: J1.1 R26.2
PMOD-2: J1.2 R27.2
PMOD-3: J1.3 R28.2
PMOD-4: J1.4 R29.2
PMOD-7: J1.7 R30.1
PMOD-8: J1.8 R31.1
PMOD-9: J1.9 R32.1
PMOD-10: J1.10 R33.1
PROG#: R9.1 R99.1 U2.21
PUDC_B: R23.2 U1.E18
Q3A_BASE: Q3.1 R79.2
RAS#: U1.V3 U3.18
RST#: R3.1 R9.2 U1.V10 X2.24
SD-CLK: U1.U8 X3.5
SD-CMD: R35.1 U1.U7 X3.3
SD-DAT0: R34.1 U1.C15 X3.7
SD-DAT1: R34.2 U1.B15 X3.8
SD-DAT2: R34.3 U1.L3 X3.1
SD-DAT3: R34.4 U1.A16 X3.2
SDRAM-CLK: U1.M1 U3.38
SDRAM-CS#: U1.W2 U3.19
SW1_NET: L1.1 U8.19
SW2_NET: L2.1 U8.2
SW3_NET: L3.1 U8.16
TCK: JP3.1 R36.1 R89.1 U2.16
TDI: JP4.1 R8.1 R90.1 U2.17
TDO: JP4.2 R37.1 R91.1 U2.18
TMS: JP3.2 R4.1 R92.1 U2.19
UART_FT_CTS#: R93.1 U1.B16 U2.41
UART_FT_DTR#: U1.M18 U2.43
UART_FT_RTS#: U1.L18 U2.40
UART_FT_RXD: R94.1 U1.G19 U2.39
UART_FT_TXD: U1.K18 U2.38
UDQM: U1.L2 U3.39
USB5V0: D1.A X1.1
USB_D_N [usb-diff]: U2.7 X1.2
USB_D_P [usb-diff]: U2.8 X1.3
VCC1V0: C79.2 C80.2 C85.1 C86.1 C87.1 C88.1 C89.1 C90.1 C91.1 C92.1 C140.1 C141.1 C142.1 C143.1 L1.2 R65.2 R79.1 U1.G10 U1.H10 U1.J10 U1.L10 U1.M10 U1.M11 U1.N10 U1.N11 X2.19
VCC1V8: C81.2 C82.2 C93.1 C94.1 C95.1 C96.1 C144.1 L2.2 L7.1 R67.2 R68.2 U1.C9 U1.H13 U1.J13 X2.18
VCC3V3: BTN.1 BTN.2 C3.2 C4.2 C5.2 C6.2 C7.2 C8.2 C9.2 C11.2 C12.2 C13.2 C38.2 C83.2 C84.2 C97.1 C98.1 C99.1 C100.1 C101.1 C102.1 C103.1 C104.1 C105.1 C106.1 C107.1 C108.1 C109.1 C110.1 C111.1 C112.1 C113.1 C114.1 C115.1 C116.1 C117.1 C118.1 C119.1 C120.1 C121.1 C122.1 C133.2 C134.2 C135.2 C136.2 C137.2 C138.2 C145.1 C146.1 J1.6 J1.12 JP4.3 L3.2 L4.2 L5.2 LD5.A Q1.1 Q1.4 R1.2 R2.2 R6.2 R7.2 R19.2 R20.2 R23.1 R34.5 R34.6 R34.7 R34.8 R35.2 R71.2 R77.2 R80.1 R81.1 R82.1 R89.2 R90.2 R91.2 R92.2 R93.2 R94.2 R96.2 R97.2 R98.2 R99.2 R100.2 U1.B19 U1.C14 U1.C18 U1.F17 U1.G12 U1.G13 U1.H3 U1.J7 U1.K1 U1.K7 U1.K12 U1.K13 U1.L7 U1.L12 U1.L13 U1.M7 U1.M8 U1.M12 U1.M17 U1.N7 U1.N8 U1.R1 U1.R17 U1.U13 U1.V1 U1.V6 U1.V9 U1.V11 U2.20 U2.31 U2.42 U2.50 U2.56 U3.1 U3.3 U3.9 U3.14 U3.27 U3.43 U3.49 U4.8 U10.8 X2.2 X2.17 X3.4
VCCADC: C123.1 C124.1 L7.2 U1.C13
VEXT: D2.A D3.K X2.44
VU: C78.2 D1.K D2.K R72.2 R75.2 R76.2 U8.3 U8.6 U8.10 U8.14 U8.17 U8.18 X2.22
WE#: U1.V4 U3.16

## Tracks (layer width: path | path; a pad name or v marks a point on that pad's centre or on a via)
A0  (via drill 0.1 pad 0.2 layers 1-2, 0.2 pad 0.3)
  Route2 0.076: U1.U2 42,8.99 41.45,8.99
  Route3 0.1: 26,4.4 v21.15,5.6
  Bottom 0.1: v21.15,5.6 21.18,5.82
  other vias: 42.5,8.74 38.3,6.32
A1  (via drill 0.1 pad 0.2 layers 1-2, 0.1 pad 0.2 layers 2-3, 0.2 pad 0.3)
  Top 0.076: 21.25,11.5 v21.25,15.3
  Route2 0.076: v21.6,18.15 22.5,18.15 22.5,18.5 22.55,18.5 22.55,18.55 22.6,18.55 22.6,18.6 23.75,18.6 23.75,18.65 24.35,18.65 24.35,18.7 | U1.T3 v43.25,9.49
  Route3 0.076: v20.48,5.45 20.85,5.45 20.85,5.8 20.9,5.8 20.9,5.85 20.95,5.85 20.95,5.9 21.25,5.9 21.25,11.5 | v21.25,15.3 21.25,16.1 21.3,16.1 21.3,16.2 21.35,16.2 21.35,16.25 21.45,16.25 21.45,16.3 21.6,16.3 v21.6,18.15 | v43.25,9.49 41.45,9.49
  Bottom 0.076: v20.48,5.45 20.5,5.45 20.5,5.68 20.38,5.79 20.38,5.82
  other vias: 43,9.24 37.5,6.32
A2  (via drill 0.1 pad 0.2 layers 1-2, 0.2 pad 0.3)
  Route2 0.076: U1.T2 42,9.49 41.45,9.49
  Bottom 0.1: 25.9,7.65 22.35,7.25 22.3,6.95 22.2,6.85 20.2,6.85 20.2,6.8 19.95,6.6 19.57,5.82
  other vias: 42.5,9.24 36.7,6.32
A3  (via drill 0.1 pad 0.2 layers 1-2, 0.2 pad 0.3)
  Route2 0.076: U1.T1 41.45,9.24
  Bottom 0.1: 19.25,6.75 18.77,5.82
  other vias: 42,9.24 35.9,6.32
A4  (via drill 0.1 pad 0.2 layers 1-2, 0.1 pad 0.2 layers 2-3, 0.2 pad 0.3)
  Route2 0.076: U1.R3 v43.25,9.99
  Route3 0.076: v43.25,9.99 41.45,9.99
  Route6 0.076: 17.5,17.6 17.45,17.6 v17.45,17.8 17.45,17.65 17.5,17.65 17.5,17.6 | 17.5,17.6 17.5,17.55 17.55,17.55 17.55,15.6 | 17.55,15.6 17.7,15.6 17.7,15.55 17.75,15.55 | 17.75,15.55 17.75,15.5 17.8,15.5 | 17.8,15.5 17.8,15.45 17.85,15.45 17.85,12.75 18,12.75 18,12.7 18.05,12.7 18.05,12.65 18.1,12.65 18.1,12.55 18.15,12.55 v18.15,11.05 | 17.5,17.6 17.55,17.6 17.55,15.6 | 17.55,15.6 17.75,15.6 17.75,15.55 | 17.75,15.55 17.8,15.55 17.8,15.5
  Route7 0.076: v18.15,11.05 18.15,10 24.05,10 24.05,9.95 24.2,9.95 24.2,9.9 24.25,9.9 24.25,9.85 25.1,9.85 25.1,9.8
  Bottom 0.076: 17.55,16.2 18.15,16.2 18.77,17.18 18.75,16.25 18.7,16.25 18.7,16.2 17.55,16.2 | 17.55,16.2 17.55,17.55 17.5,17.55 17.5,17.6 | 17.5,17.6 17.45,17.6 v17.45,17.8 17.45,17.65 17.5,17.65 17.5,17.6 | 17.55,16.2 17.55,17.6 17.5,17.6
  other vias: 43,9.74 35.9,17.68
A5  (via drill 0.1 pad 0.2 layers 1-2, 0.1 pad 0.2 layers 7-16, 0.2 pad 0.3)
  Route2 0.076: U1.R2 42,9.99 41.45,9.99
  other vias: 19.57,17.18 42.5,9.74 36.7,17.68
A6  (via drill 0.1 pad 0.2 layers 1-2, 0.1 pad 0.2 layers 2-3, 0.2 pad 0.3)
  Route2 0.076: v20.4,11.75 20.4,9.8 20.35,9.8 20.35,7.75 20.3,7.75 20.3,7.45 v20.2,7.45 | U1.P3 v43.25,10.49
  Route3 0.076: v20.4,17.85 v20.4,11.75 | v43.25,10.49 41.45,10.49
  Route6 0.076: v20.2,7.45 20.2,5.75 20.6,5.75 20.6,5.7 20.7,5.7 20.7,5.65 20.75,5.65 20.75,4.9 21.25,4.9 21.25,4.85 21.3,4.85 21.3,4.8 21.35,4.8 21.35,4.75 21.4,4.75 21.4,4.25
  Bottom 0.076: 20.38,17.18 v20.4,17.85
  other vias: 43,10.24 37.5,17.68
A7  (via drill 0.1 pad 0.2 layers 1-2, 0.2, 0.2 pad 0.3)
  Top 0.076: v20.57,1.64 20.73,1.79 20.84,1.79 20.99,1.94 20.99,3.39 19.81,4.57 v19.81,4.72 | v20.38,4.99 20.38,5.14 20.12,5.41 20.12,6.44 v18.97,7.58 | v17.83,12.46 v20.65,9.64 | v17.22,13.07 16.69,13.6 16.69,13.87 16.46,14.1 15.28,14.1 v14.94,14.44 | v15.09,15.93 15.43,16.27 16.73,16.27 18.1,17.64 20,17.64 20.12,17.75 20.12,17.95 20.5,18.33 v20.73,18.33
  Route2 0.076: U1.P1 41.45,10.24
  Bottom 0.076: 26.29,0.38 24.5,2.17 21.22,2.17 20.69,1.64 v20.57,1.64 | v19.81,4.72 20.12,4.72 v20.38,4.99 | v18.97,7.58 20.65,9.26 v20.65,9.64 | v17.22,13.07 v17.83,12.46 | v14.94,14.44 14.94,14.74 15.05,14.86 15.05,15.89 v15.09,15.93 | v20.73,18.33 21.07,18.33 21.26,18.14 21.26,17.26 21.18,17.18
  other vias: 42,10.24 38.3,17.68
A8  (via drill 0.1 pad 0.2 layers 1-2, 0.1 pad 0.2 layers 2-3, 0.2 pad 0.3)
  Route2 0.076: U1.N3 v43.25,10.99
  Route2 0.1: 24.6,18.45 v22.8,18.3
  Route3 0.076: v43.25,10.99 41.45,10.99
  Bottom 0.1: v22.8,18.3 22.35,17.95 21.98,17.18
  other vias: 43,10.74 39.1,17.68
A9  (via drill 0.1 pad 0.2 layers 1-2, 0.2, 0.2 pad 0.3)
  Route2 0.076: U1.N2 42,10.99 41.45,10.99
  Route3 0.076: v25.07,14.06 24.96,13.95 23.2,13.95 v22.86,13.6
  Route7 0.076: v20.99,18.02 22.67,16.34 22.67,16.15 24.77,14.06 v25.07,14.06
  Bottom 0.076: v25.07,14.06 25.26,13.87 | 22.77,17.18 22.78,17.14 22.78,16.99 22.14,16.34 20.99,16.34 20.8,16.54 20.8,17.83 v20.99,18.02
  other vias: 42.5,10.74 39.9,17.68
A10  (via drill 0.1 pad 0.2 layers 1-2, 0.1 pad 0.2 layers 2-3, 0.1 pad 0.2 layers 7-16, 0.2 pad 0.3)
  Route2 0.076: U1.U3 v43.25,8.99
  Route3 0.076: v43.25,8.99 41.45,8.99
  Route6 0.076: v6.15,7.8 6.6,7.8 6.6,7.85 6.65,7.85 6.65,8 6.7,8 6.7,8.1 6.75,8.1 6.75,8.15 6.85,8.15 6.85,8.2 7,8.2 7,8.3 7.55,8.3 7.55,8.35 7.65,8.35 7.65,8.4 9.05,8.4 9.05,8.55 9.1,8.55 9.1,8.6 9.15,8.6 9.15,8.65 9.2,8.65 9.2,8.75 9.35,8.75 9.35,8.8 9.65,8.8 9.65,8.75 9.7,8.75 9.7,8.7 9.8,8.7 9.8,8.5 9.85,8.5 9.85,8.35 9.9,8.35 9.9,8.15 9.95,8.15 9.95,8.1 11.25,8.1 11.25,8 11.3,8 11.3,7.95 11.35,7.95 11.35,7.9 11.4,7.9 11.4,7.85 11.45,7.85 11.45,7.8 11.5,7.8 11.5,7.75 14.4,7.75 14.4,7.35 14.45,7.35 14.45,7.25 14.55,7.25 14.55,7.2 15.8,7.2 15.8,7.1 15.85,7.1 15.85,7 15.9,7 15.9,6.95 17.25,6.95 17.25,7 17.3,7 17.3,7.05 17.35,7.05 17.35,7.1 v18.05,7.1
  Route7 0.076: v21.98,5.82 21.95,5.75 21.95,4.8 21.9,4.8 21.9,4.65 21.85,4.65 21.85,4.6 21.75,4.6 21.75,4.55 21.7,4.55 21.7,4.4 21.3,4.4 21.3,4.25 21.15,4.25 21.15,4.2 20.55,4.2 20.55,4.25 20.5,4.25 20.5,4.3 17.75,4.3 17.75,4.35 17.65,4.35 17.65,4.4 17.6,4.4 17.6,4.5 15.75,4.5 15.75,4.55 14.6,4.55 14.6,4.6 14.5,4.6 14.5,4.7 14.45,4.7 14.45,4.9 13.65,4.9 13.65,4.95 13.6,4.95 13.6,5 13.55,5 13.55,5.05 13.5,5.05 13.5,5.25 8.4,5.25 8.4,5.3 8.35,5.3 8.35,5.35 8.2,5.35 8.2,5.55 6.95,5.55 6.95,5.6 6.9,5.6 6.9,5.75 6.85,5.75 6.85,5.9 5.7,5.9 5.7,6.4 5.75,6.4 5.75,6.45 5.85,6.45 5.85,6.5 5.9,6.5 5.9,6.55 5.95,6.55 5.95,6.6 6,6.6 6,6.65 6.1,6.65 6.1,6.75 6.15,6.75 v6.15,7.8
  Bottom 0.076: v18.05,7.1 19.4,7.1 19.4,7.3 19.45,7.3 19.45,7.4 19.5,7.4 19.5,7.45 19.55,7.45 19.55,7.5 19.65,7.5 19.65,7.55 19.9,7.55 19.9,7.6 19.95,7.6 19.95,7.65 20,7.65 20,7.7 20.05,7.7 20.05,7.75 20.35,7.75 20.35,8.05 20.4,8.05 20.4,8.1 20.45,8.1 20.45,8.15 20.5,8.15 20.5,8.2 20.55,8.2 20.55,8.25 20.6,8.25 20.6,8.3 20.65,8.3 20.65,8.35 20.7,8.35 20.7,8.4 20.75,8.4 20.75,8.45 20.8,8.45 20.8,8.5 20.85,8.5 20.85,8.55 20.9,8.55 20.9,8.6 20.95,8.6 20.95,8.65 21,8.65 21,8.7 | 21.7,9.45 21.8,9.45 21.8,9.5 22,9.5 22,9.7 22.05,9.7 | 22.95,10 22.95,9.95 23.15,9.95 23.15,10.1 24.4,10.1 24.4,9.85 25.2,9.85 25.2,9.8 25.25,9.8 25.25,9.65 25.55,9.65 25.55,9.7 25.6,9.7 25.6,9.75
  other vias: 43,8.74 39.1,6.32
A11  (via drill 0.1 pad 0.2 layers 1-2, 0.2 pad 0.3)
  Route2 0.076: U1.N1 41.45,10.74
  Route3 0.1: 23.95,17.95 v23.55,16.4
  Bottom 0.1: v23.55,16.4 23.57,17.18
  other vias: 42,10.74 40.7,17.68
A12  (via drill 0.1 pad 0.2 layers 1-2, 0.1 pad 0.2 layers 2-3, 0.2 pad 0.3)
  Route2 0.076: U1.M3 v43.25,11.49
  Route3 0.076: v43.25,11.49 41.45,11.49
  Route7 0.076: v19.35,15.35 19.5,15.35 19.5,15.45 19.55,15.45 19.55,15.55 19.6,15.55 19.6,15.6 19.65,15.6 19.65,15.65 19.9,15.65 19.9,18.15 19.95,18.15 19.95,18.2 20,18.2 20,18.3 20.05,18.3 20.05,18.35 20.1,18.35 20.1,18.4 20.25,18.4 20.25,18.65 20.3,18.65 20.3,18.7 20.35,18.7 20.35,18.75 20.4,18.75 20.4,21.2 20.45,21.2 20.45,21.25 20.5,21.25 20.5,21.3 20.55,21.3 20.55,21.35 20.85,21.35 20.85,21.3 v21.05,21.3
  Bottom 0.076: 24.55,14.35 24.55,14.5 21.7,14.5 21.7,14.55 21.65,14.55 21.65,14.6 21.6,14.6 21.6,14.65 21.55,14.65 21.55,15 21.1,15 21.1,15.05 19.7,15.05 19.7,15.1 19.6,15.1 19.6,15.15 19.55,15.15 19.55,15.25 19.5,15.25 19.5,15.35 v19.35,15.35 | 24.38,17.18 24.2,17.75 24.2,19.3 24.15,19.3 24.15,19.45 24.1,19.45 24.1,19.55 24.05,19.55 24.05,19.6 24,19.6 24,19.65 23.95,19.65 23.95,19.7 23.85,19.7 23.85,19.75 23.7,19.75 23.7,19.8 22.85,19.8 22.85,20.45 22.8,20.45 22.8,20.55 22.75,20.55 22.75,20.6 22.7,20.6 22.7,20.65 22.6,20.65 22.6,20.7 22.45,20.7 22.45,20.75 21.05,20.75 v21.05,21.3
  other vias: 43,11.24 41.5,17.68
AIN15_N  (via drill 0.1 pad 0.2 layers 1-2)
  Route2 0.076: U1.G2 42,13.99 41.45,13.99
  other vias: 42.5,13.74
AIN15_P  (via drill 0.1 pad 0.2 layers 1-2, 0.1 pad 0.2 layers 2-3)
  Route2 0.076: U1.G3 v43.25,13.99
  Route3 0.076: v43.25,13.99 41.45,13.99
  other vias: 43,13.74
AIN16_N  (via drill 0.1 pad 0.2 layers 1-2)
  Route2 0.076: U1.J2 42,12.99 41.45,12.99
  other vias: 42.5,12.74
AIN16_P  (via drill 0.1 pad 0.2 layers 1-2)
  Route2 0.076: U1.H2 42,13.49 41.45,13.49
  other vias: 42.5,13.24
ANALOG-IO0
  Route2 0.1: X2.42 5.05,2.1 5.1,2.55 6.7,3.4 13.4,3.6 21.05,5.95 24.8,6.7
ANALOG-IO1
  Top 0.1: X2.43 5.2,2.6 5.2,2.65 7.15,2.65 7.1,3.25 6.9,3.35 6.9,5.4 15.15,8.2 15.35,8.45 17.8,8.2 22.95,8.2 22.95,6.55 22.65,6.4 22.65,3.95 23,3.65 24.25,3.65 R14.2
BS0  (via drill 0.1 pad 0.2 layers 1-2, 0.2 pad 0.3)
  Route2 0.076: U1.V2 42,8.49 41.45,8.49
  Route3 0.076: 26,2.8 26,3.3 25.55,3.3 v25.55,3.25
  Bottom 0.076: v25.55,3.25 25.2,3.25 25.2,3.3 24.7,3.3 24.7,3.2 24.65,3.2 24.65,3.15 24.6,3.15 24.6,3.1 24.55,3.1 24.55,3.05 24.1,3.05 24.1,3.2 24.05,3.2 24.05,3.25 24,3.25 24,3.3 23.95,3.3 23.95,3.35 23.75,3.35 23.75,4.3 23.7,4.3 23.7,4.35 23.65,4.35 23.65,4.4 23.6,4.4 23.6,5.25 23.57,5.82
  other vias: 42.5,8.24 40.7,6.32
BS1  (via drill 0.1 pad 0.2 layers 1-2, 0.1 pad 0.2 layers 7-16)
  Route2 0.076: U1.U1 41.45,8.74
  other vias: 42,8.74 22.77,5.82
BTN  (via drill 0.1 pad 0.2 layers 1-2, 0.2 pad 0.3)
  Route7 0.076: 23.75,12.5 23.75,12.65 23.7,12.65 23.7,12.75 23.65,12.75 23.65,12.8 17.3,12.8 17.3,12.75 16.05,12.75 16.05,13.15 v14.85,13.15
  Bottom 0.076: v14.85,13.15 15.25,13.15 15.25,13.25 R85.2
  other vias: 50,10.74
CAS#  (via drill 0.1 pad 0.2 layers 1-2, 0.2 pad 0.3)
  Route2 0.076: v23.9,4.55 25.8,4.55 v25.8,5 | U1.W3 43,7.19
  Bottom 0.076: 26.15,2.8 26.15,3.4 25.9,3.4 25.9,3.55 25.85,3.55 25.85,3.6 25.55,3.6 25.55,3.65 25,3.65 25,3.7 24.6,3.7 24.6,3.75 24.55,3.75 24.55,3.8 24.5,3.8 24.5,3.85 24.45,3.85 24.45,4 24.4,4 24.4,4.15 24.35,4.15 24.35,4.3 24.3,4.3 24.3,4.5 24.25,4.5 24.25,4.55 v23.9,4.55 | v25.8,5 25.8,5.25 25.98,5.82
  other vias: 43,7.74 43.1,6.32
CFG-M0  (via drill 0.1 pad 0.2 layers 1-2)
  Route2 0.076: U1.V12 47.75,7.74 47.75,7.19
  other vias: 47.5,8.24
CFG-M1  (via drill 0.1 pad 0.2 layers 1-2)
  Route2 0.076: U1.W11 47,7.19
  other vias: 47,7.74
CFG-M2  (via drill 0.1 pad 0.2 layers 1-2, 0.1 pad 0.2 layers 2-3)
  Route2 0.076: U1.U10 v46.25,8.49
  Route3 0.076: v46.25,8.49 46.25,7.19
  other vias: 46.5,8.74
CHAN0  (via drill 0.1 pad 0.2 layers 1-2)
  Route2 0.076: U1.B18 51,16.49 51.55,16.49
  other vias: 50.5,16.24
CHAN1  (via drill 0.1 pad 0.2 layers 1-2)
  Route2 0.076: U1.A18 50.5,17.29
  other vias: 50.5,16.74
CHAN2  (via drill 0.1 pad 0.2 layers 1-2)
  Route2 0.076: U1.B17 50.25,16.74 50.25,17.29
  other vias: 50,16.24
CHAN3  (via drill 0.1 pad 0.2 layers 1-2)
  Route2 0.076: U1.A17 50,17.29
  other vias: 50,16.74
CHAN4  (via drill 0.1 pad 0.2 layers 1-2, 0.1 pad 0.2 layers 2-3)
  Route2 0.076: U1.C16 v49.25,15.49
  Route3 0.076: v49.25,15.49 49.25,17.29
  other vias: 49.5,15.74
CHAN5  (via drill 0.1 pad 0.2 layers 1-2, 0.1 pad 0.2 layers 2-3)
  Route2 0.076: U1.D17 v49.75,15.49
  other vias: 50,15.24
CHAN6  (via drill 0.1 pad 0.2 layers 1-2, 0.1 pad 0.2 layers 2-3)
  Route2 0.076: U1.H17 v49.75,13.49
  Route3 0.076: v49.75,13.49 50.25,13.99 51.55,13.99
  Route6 0.076: 26.85,23.25 26.85,23.2 25.5,23.2 25.5,23.25 25.45,23.25 25.45,23.3 24.85,23.3 24.85,23.4 24.6,23.4 24.6,23.55 X2.11
  other vias: 50,13.24
CHAN7  (via drill 0.1 pad 0.2 layers 1-2)
  Route2 0.076: U1.H19 51.55,13.24
  other vias: 51,13.24
CHAN8  (via drill 0.1 pad 0.2 layers 1-2)
  Route2 0.076: U1.J18 51,12.99 51.55,12.99
  Route6 0.076: 22.9,22.05 22.9,23.1 22.85,23.1 22.85,23.2 22.8,23.2 22.8,23.25 21.8,23.25 21.8,23.2 20.85,23.2 20.85,23.25 20.75,23.25 20.75,23.3 20.6,23.3 20.6,23.35 19.8,23.35 19.8,23.4 19.45,23.4 19.45,23.5 X2.13
  other vias: 50.5,12.74
CHAN9  (via drill 0.1 pad 0.2 layers 1-2, 0.1 pad 0.2 layers 2-3, 0.2 pad 0.3)
  Route2 0.076: U1.J17 v49.75,12.99
  Route3 0.076: 21.55,6.25 21.55,11.65 21.5,11.65 21.5,11.7 21.45,11.7 21.45,11.75 21.4,11.75 21.4,11.8 20.7,11.8 20.7,11.6 20.65,11.6 20.65,11.55 20.6,11.55 20.6,11.5 20.55,11.5 20.55,11.45 20.1,11.45 20.1,15.5 20.05,15.5 20.05,15.6 19.95,15.6 19.95,15.65 19.2,15.65 19.2,16.1 19.15,16.1 19.15,16.2 19.05,16.2 19.05,16.25 16.65,16.25 16.65,15.85 16.6,15.85 16.6,15.8 16.55,15.8 16.55,15.75 16.5,15.75 16.5,15.7 15.8,15.7 15.8,15.65 14.45,15.65 14.45,15.6 14.4,15.6 14.4,15.55 14.35,15.55 14.35,15.5 14.3,15.5 14.3,14.35 11.65,14.35 11.65,14.3 11.6,14.3 11.6,14.25 11.55,14.25 11.55,14.2 11.5,14.2 11.5,14.15 11.45,14.15 11.45,14.1 11.4,14.1 11.4,14 11.35,14 11.35,12.85 v10.1,12.85 | v49.75,12.99 51.55,12.99
  Route6 0.076: v10.1,12.85 10.4,12.85 10.4,18.8 10.45,18.8 10.45,18.85 10.55,18.85 10.55,18.95 10.6,18.95 10.6,19 10.9,19 10.9,19.05 10.95,19.05 10.95,19.1 11,19.1 11,19.2 11.05,19.2 11.05,19.25 11.1,19.25 11.1,19.3 11.15,19.3 11.15,19.35 11.2,19.35 11.2,19.4 11.25,19.4 11.25,19.45 12.3,19.45 12.3,19.5 13.55,19.5 13.55,19.7 13.6,19.7 13.6,19.85 13.65,19.85 13.65,19.9 13.75,19.9 13.75,19.95 15.4,19.95 15.4,20.15 15.45,20.15 15.45,20.2 15.5,20.2 15.5,20.25 15.8,20.25 15.8,23.4 16.1,23.4 16.1,23.5 X2.14
  other vias: 50,12.74
CHAN10  (via drill 0.1 pad 0.2 layers 1-2, 0.2 pad 0.3)
  Top 0.076: v20.55,22.9 14.7,22.9 14.7,23.4 14.45,23.4 14.45,23.55 X2.15
  Route2 0.076: U1.J19 51.55,12.74
  Route7 0.076: 25.65,16.65 25.65,16.7 25.5,16.7 25.5,16.85 23.4,16.85 23.4,16.9 23.25,16.9 23.25,17.05 22.7,17.05 22.7,17.35 22.55,17.35 22.55,17.5 21.9,17.5 21.9,18.3 21.85,18.3 21.85,18.35 21.8,18.35 21.8,18.4 21.75,18.4 21.75,18.45 21.65,18.45 21.65,19.7 21.6,19.7 21.6,19.85 21.55,19.85 21.55,20.45 21.5,20.45 21.5,20.55 21.45,20.55 21.45,20.6 21.4,20.6 21.4,20.65 21.35,20.65 21.35,21.45 21.3,21.45 21.3,21.5 21.25,21.5 21.25,21.55 21.2,21.55 21.2,21.6 20.55,21.6 v20.55,22.9
  other vias: 51,12.74
CHAN11  (via drill 0.1 pad 0.2 layers 1-2, 0.1 pad 0.2 layers 2-3, 0.2 pad 0.3)
  Route2 0.076: v21.2,19.65 20.2,19.65 20.2,19.75 20.15,19.75 20.15,19.85 20.1,19.85 20.1,19.9 19,19.9 19,20.55 18.95,20.55 18.95,20.6 18.9,20.6 18.9,20.65 18.05,20.65 v18.05,21.3 | U1.K17 v49.75,12.49
  Route3 0.076: v18.05,21.3 12.15,21.3 12.15,23.4 11.9,23.4 11.9,23.55 X2.16 | v49.75,12.49 51.55,12.49
  Route6 0.076: 24.8,17.55 24.8,17.65 24.75,17.65 24.75,17.7 23.4,17.7 23.4,19.6 23.35,19.6 23.35,19.65 23.3,19.65 23.3,19.7 23.25,19.7 23.25,19.75 22.5,19.75 22.5,19.8 22.45,19.8 22.45,19.85 21.2,19.85 v21.2,19.65
  other vias: 50,12.24
CHAN12  (via drill 0.1 pad 0.2 layers 1-2)
  Route2 0.076: U1.W19 51.55,7.74
  other vias: 51,7.74
CHAN13  (via drill 0.1 pad 0.2 layers 1-2)
  Route2 0.076: U1.W18 50.5,7.19
  other vias: 50.5,7.74
CHAN14  (via drill 0.1 pad 0.2 layers 1-2)
  Route2 0.076: U1.W17 50,7.19
  other vias: 50,7.74
CHAN15  (via drill 0.1 pad 0.2 layers 1-2)
  Route2 0.076: U1.V17 50.25,7.74 50.25,7.19
  other vias: 50,8.24
CHAN16  (via drill 0.1 pad 0.2 layers 1-2)
  Route2 0.076: U1.W16 49.5,7.19
  other vias: 49.5,7.74
CHAN17  (via drill 0.1 pad 0.2 layers 1-2, 0.1 pad 0.2 layers 2-3)
  Route2 0.076: U1.U16 v49.25,8.99
  Route3 0.076: v49.25,8.99 49.75,8.49 49.75,7.19
  other vias: 49.5,8.74
CHAN18  (via drill 0.1 pad 0.2 layers 1-2)
  Route2 0.076: U1.V16 49.75,7.74 49.75,7.19
  other vias: 49.5,8.24
CHAN19  (via drill 0.1 pad 0.2 layers 1-2)
  Route2 0.076: U1.W15 49,7.19
  other vias: 49,7.74
CHAN20  (via drill 0.1 pad 0.2 layers 1-2)
  Route2 0.076: U1.V15 49.25,7.74 49.25,7.19
  other vias: 49,8.24
CHAN21  (via drill 0.1 pad 0.2 layers 1-2, 0.1 pad 0.2 layers 2-3)
  Route2 0.076: U1.U15 v48.75,8.49
  Route3 0.076: v48.75,8.49 48.75,7.19
  other vias: 49,8.74
CHAN22  (via drill 0.1 pad 0.2 layers 1-2)
  Route2 0.076: U1.W14 48.5,7.19
  Route6 0.076: 25.8,2.4 X2.35 25,1.25 25,1.6 25.05,1.6 25.05,1.7 25.1,1.7 25.1,1.8 25.15,1.8 25.15,1.85 25.2,1.85 25.2,1.9 25.25,1.9 25.25,1.95 25.3,1.95 25.3,2 25.35,2 25.35,2.05 25.45,2.05 25.45,2.1 25.5,2.1 25.5,2.15 25.65,2.15 25.65,2.2
  other vias: 48.5,7.74
CHAN23  (via drill 0.1 pad 0.2 layers 1-2)
  Route2 0.076: U1.V14 48.75,7.74 48.75,7.19
  other vias: 48.5,8.24
CHAN24  (via drill 0.1 pad 0.2 layers 1-2, 0.1 pad 0.2 layers 2-3)
  Route2 0.076: U1.U14 v48.75,8.99
  Route3 0.076: v48.75,8.99 49.25,8.49 49.25,7.19
  other vias: 48.5,8.74
CHAN25  (via drill 0.1 pad 0.2 layers 1-2)
  Route2 0.076: U1.W13 48,7.19
  Route6 0.076: X2.38 16.65,1.25 16.65,2.8 16.7,2.8 16.7,2.85 16.75,2.85 16.75,2.9 23.5,2.9 23.5,3.25 23.55,3.25 23.55,3.3 23.6,3.3 23.6,3.35 24.1,3.35 24.1,3.55 24.15,3.55 24.15,3.6 24.2,3.6 24.2,3.65
  other vias: 48,7.74
CHAN26  (via drill 0.2 pad 0.3)
  Route7 0.076: X2.39 14.85,1.25 14.85,1.5 14.9,1.5 14.9,1.65 14.95,1.65 14.95,1.75 15,1.75 15,1.8 15.05,1.8 15.05,1.9 15.1,1.9 15.1,1.95 15.15,1.95 15.15,2 15.25,2 15.25,2.05 15.3,2.05 15.3,2.1 15.45,2.1 15.45,2.15 16.65,2.15 16.65,2.75 16.7,2.75 16.7,2.8 16.75,2.8 16.75,2.85 16.8,2.85 16.8,2.9 17.1,2.9 17.1,2.85 17.15,2.85 17.15,2.8 17.2,2.8 17.2,2.75 17.25,2.75 17.25,2.6 17.5,2.6 17.5,2.55 17.55,2.55 17.55,2.5 17.9,2.5 17.9,2.45
  other vias: 48,8.25
CHAN27  (via drill 0.2 pad 0.3)
  Route7 0.076: X2.40 12.3,1.25 12.3,1.5 12.35,1.5 12.35,1.65 12.4,1.65 12.4,1.75 12.45,1.75 12.45,1.8 12.5,1.8 12.5,1.9 12.55,1.9 12.55,1.95 12.6,1.95 12.6,2 12.7,2 12.7,2.05 12.75,2.05 12.75,2.1 12.9,2.1 12.9,2.15 13.1,2.15 13.1,2.2 15.1,2.2 15.1,2.25 15.15,2.25 15.15,2.3 15.2,2.3 15.2,2.35 16.45,2.35 16.45,2.9 16.5,2.9 16.5,2.95 16.6,2.95 16.6,3.05 16.65,3.05 16.65,3.1 23.5,3.1 23.5,3.2 23.55,3.2 23.55,3.25 23.6,3.25 23.6,3.3 23.65,3.3 23.65,3.35 24.1,3.35 24.1,3.5 24.15,3.5 24.15,3.55 24.2,3.55 24.2,3.6 24.25,3.6 24.25,3.65
  other vias: 50.5,9.25
CHAN28  (via drill 0.2 pad 0.3)
  Route2 0.076: X2.41 9.35,1.25 9.35,2.5 9.4,2.5 9.4,2.6 9.5,2.6 9.5,2.65 14.45,2.65 14.45,3.1 14.5,3.1 14.5,3.2 14.55,3.2 14.55,3.3 14.65,3.3 14.65,3.35 21.75,3.35 21.75,3.6 21.8,3.6 21.8,3.65 21.85,3.65 21.85,3.9 21.9,3.9 21.9,4.05 21.95,4.05 21.95,4.1 22.05,4.1 22.05,4.15
  other vias: 51,9.75
CHAN-CLK  (via drill 0.1 pad 0.2 layers 1-2)
  Route2 0.076: U1.P18 51,10.49 51.55,10.49
  other vias: 50.5,10.24
CKE  (via drill 0.1 pad 0.2 layers 1-2, 0.2 pad 0.3)
  Route2 0.076: U1.M2 42,11.49 41.45,11.49
  Route2 0.1: 25.75,16.15 v25.15,16.4
  Bottom 0.1: v25.15,16.4 25.18,17.18
  other vias: 42.5,11.24 42.3,17.68
CLK-12M-FPGA  (via drill 0.1 pad 0.2 layers 1-2, 0.1 pad 0.2 layers 2-3, 0.2 pad 0.3)
  Top 0.076: v25.3,16 25.4,16 | 25.4,16 25.4,16.2 25.45,16.2 25.45,16.25 | 25.45,16.25 25.5,16.25 25.5,16.3 25.55,16.3 25.55,16.35 25.6,16.35 25.6,16.4 | 25.6,16.4 25.65,16.4 25.65,16.45 25.85,16.45 | 25.4,16 25.4,16.15 25.45,16.15 25.45,16.25 | 25.6,16.4 25.7,16.4 25.7,16.45 25.85,16.45 | 25.85,16.45 R25.2
  Route2 0.076: U1.L17 v49.75,11.99
  Route3 0.076: v49.75,11.99 51.55,11.99
  Route6 0.076: 26.5,20.15 26.5,20.1 26.45,20.1 26.45,20.05 26.4,20.05 26.4,20 26.35,20 26.35,19.85 26.15,19.85 26.15,19.8 26.1,19.8 26.1,19.75 26.05,19.75 26.05,19.7 26,19.7 26,19.4 | 26,19.4 v24.6,19.4 | 26,18.65 26,19.4
  Bottom 0.076: v24.6,19.4 24.6,18.45 24.85,18.45 24.85,18.4 25.55,18.4 25.55,18.35 25.6,18.35 | 25.6,18.35 25.6,18.3 25.65,18.3 25.65,17.95 25.6,17.95 25.6,16 | 25.6,16 v25.3,16 | 25.6,18.35 25.6,18.25 25.65,18.25 25.65,17.9 25.6,17.9 25.6,16
  other vias: 50,11.74
CLK-12M-FT  (via drill 0.2 pad 0.3)
  Top 0.1: v24.85,16 23.95,16 R24.2
  Route2 0.1: 26.95,15 26.95,15.05 26.9,15.05 26.9,15.1 26.75,15.1 v26.75,15.45
  Route3 0.1: v26.75,15.45 25.4,15.45 25.4,15.5 25.35,15.5 25.35,15.55 25.3,15.55 25.3,15.6 24.85,15.6 v24.85,16
CLK-12M-SHARED  (via drill 0.2 pad 0.3)
  Top 0.1: Q1.3 v24.77,18.13 | R24.1 v22.95,16.26 | R25.1 v25.36,18.12
  Route2 0.1: v25.36,18.12 v24.77,18.13 v22.95,16.26
D0  (via drill 0.1 pad 0.2 layers 1-2, 0.2 pad 0.3)
  Route2 0.076: U1.V8 45.75,7.74 45.75,7.19
  other vias: 45.5,8.24 55.1,6.32
D1  (via drill 0.1 pad 0.2 layers 1-2, 0.2 pad 0.3)
  Route2 0.076: U1.V7 45.25,7.74 45.25,7.19
  other vias: 45,8.24 53.5,6.32
D2  (via drill 0.1 pad 0.2 layers 1-2, 0.2 pad 0.3)
  Route2 0.076: U1.W7 45,7.19
  other vias: 45,7.74 52.7,6.32
D3  (via drill 0.1 pad 0.2 layers 1-2, 0.2 pad 0.3)
  Route2 0.076: U1.W6 44.5,7.19
  other vias: 44.5,7.74 51.1,6.32
D4  (via drill 0.1 pad 0.2 layers 1-2, 0.1 pad 0.2 layers 2-3, 0.2 pad 0.3)
  Route2 0.076: U1.U5 v44.25,8.49
  Route3 0.076: v44.25,8.49 44.25,7.19
  other vias: 44,8.74 50.3,6.32
D5  (via drill 0.1 pad 0.2 layers 1-2, 0.2 pad 0.3)
  Route2 0.076: U1.W5 44,7.19
  other vias: 44,7.74 48.7,6.32
D6  (via drill 0.1 pad 0.2 layers 1-2, 0.2 pad 0.3)
  Route2 0.076: U1.V5 44.25,7.74 44.25,7.19
  other vias: 44,8.24 47.9,6.32
D7  (via drill 0.1 pad 0.2 layers 1-2, 0.1 pad 0.2 layers 2-3, 0.2 pad 0.3)
  Route2 0.076: U1.U4 v43.75,8.99
  Route3 0.076: v43.75,8.99 43.75,7.19
  other vias: 43.5,8.74 46.3,6.32
D8  (via drill 0.1 pad 0.2 layers 1-2, 0.2 pad 0.3)
  Route2 0.076: U1.L1 41.45,11.74
  other vias: 42,11.74 46.3,17.68
D9  (via drill 0.1 pad 0.2 layers 1-2, 0.1 pad 0.2 layers 2-3, 0.2 pad 0.3)
  Route2 0.076: U1.K3 v42.75,11.99
  Route3 0.076: v42.75,11.99 41.45,11.99
  other vias: 43,12.24 47.9,17.68
D10  (via drill 0.1 pad 0.2 layers 1-2, 0.2 pad 0.3)
  Route2 0.076: U1.K2 42,12.49 41.45,12.49
  other vias: 42.5,12.24 48.7,17.68
D11  (via drill 0.1 pad 0.2 layers 1-2, 0.2 pad 0.3)
  Route2 0.076: U1.J1 41.45,12.74
  other vias: 42,12.74 50.3,17.68
D12  (via drill 0.1 pad 0.2 layers 1-2, 0.2 pad 0.3)
  other vias: 43,12.74 51.1,17.68
D13  (via drill 0.1 pad 0.2 layers 1-2)
  Route2 0.076: U1.H1 41.45,13.24
  other vias: 42,13.24
D14  (via drill 0.1 pad 0.2 layers 1-2, 0.2 pad 0.3)
  Route2 0.076: U1.A14 48.5,17.29
  other vias: 48.5,16.74 53.5,17.68
D15  (via drill 0.1 pad 0.2 layers 1-2, 0.2 pad 0.3)
  Route2 0.076: U1.A15 49,17.29
  other vias: 49,16.74 55.1,17.68
EE-CLK  (via drill 0.2 pad 0.3)
  Top 0.076: v17.05,6.3 17.05,6.05 17.5,6.05 17.5,6 17.55,6 17.55,5.95 17.6,5.95 17.6,5.7 19.5,5.7 19.5,5.65 19.65,5.65 19.65,5.6 19.75,5.6 19.75,5.55 19.8,5.55 19.8,5.5 19.85,5.5 19.85,5.45 19.9,5.45 19.9,5.4 19.95,5.4 19.95,5.3 20,5.3 20,5.2 20.05,5.2 20.05,5.05 20.1,5.05 20.1,4.5 v20.7,4.5 | v9.15,15.85 9.15,14.9 9.35,14.9 9.35,14.85 9.4,14.85 9.4,14.8 9.45,14.8 v9.45,10.8
  Route2 0.076: v20.7,4.5 20.8,4.5 20.8,4.75 20.85,4.75 20.85,4.8 20.9,4.8 20.9,4.85 20.95,4.85 20.95,4.9 23.05,4.9 | 23.05,4.9 23.05,4.95 23.05,4.9 | v3.5,11.8 3.5,7.5 9.22,7.5 | 9.22,7.5 10.25,7.5 10.25,7.45 10.35,7.45 10.35,7.4 10.4,7.4 10.4,7.35 10.85,7.35 10.85,7.3 10.9,7.3 10.9,7.25 10.95,7.25 10.95,6.3 v17.05,6.3 19.25,6.4 v19.25,10.35 | v9.45,10.8 9.45,8.5 9.35,8.5 9.35,8.45 9.3,8.45 9.3,8.3 9.25,8.3 9.25,7.51 | 9.25,7.51 9.25,7.5 9.22,7.5 | 9.22,7.5 9.22,7.51 9.25,7.51
  Route6 0.076: v20.7,4.5 20.1,4.5 20.1,4.9 20.05,4.9 20.05,4.95 20,4.95 20,5 16.1,5 16.1,5.05 16.05,5.05 16.05,5.1 14.9,5.1 14.9,5.15 14.55,5.15 14.55,5.35 14.5,5.35 14.5,5.45 14.45,5.45 14.45,6.95 14.4,6.95 14.4,7 14.35,7 14.35,7.05 14.3,7.05 14.3,7.1 13.45,7.1 13.45,7.35 13.4,7.35 13.4,7.4 13.35,7.4 13.35,7.45 10.2,7.45 10.2,7.5 5.1,7.5 v5.1,11.8 8.75,11.8 v8.75,15.85 | v19.25,10.35 19.25,9.95 20.75,9.95 20.75,9.9 20.85,9.9 20.85,9.85 20.9,9.85 20.9,9.8 20.95,9.8 20.95,9.55 22,9.55 22,9.4 22.05,9.4 22.05,9.3 22.15,9.3 22.15,9.25 25.55,9.25 25.55,9.2 25.6,9.2 25.6,9.15
  Bottom 0.076: v5.1,11.8 5.1,11.65 4.65,11.65 R96.1 v3.5,11.8 | v8.75,15.85 U10.2 v9.15,15.85
EE-CS  (via drill 0.2 pad 0.3)
  Route3 0.1: v9.89,19.06 v7.24,13.38
  Bottom 0.1: R98.1 v7.24,13.38 | U10.1 v9.89,19.06
EE-DATA  (via drill 0.2 pad 0.3)
  Top 0.076: v16.35,8 16.35,7.85 v20.9,7.85
  Route2 0.076: 9.49,11.45 12.15,11.45 12.15,11.4 12.2,11.4 12.2,11.35 12.25,11.35 12.25,11.3 12.3,11.3 12.3,11.05 12.55,11.05 12.55,11 12.6,11 12.6,10.95 12.65,10.95 12.65,8.75 15,8.75 15,8.7 15.05,8.7 15.05,8.65 15.1,8.65 15.1,8.45 15.5,8.45 15.5,8.4 15.65,8.4 15.65,8.35 15.7,8.35 15.7,8.3 15.75,8.3 15.75,8 v16.35,8 | v25.75,9.45 25.75,8.7 | v9.15,14.6 9.15,13.6 9.3,13.6 9.3,13.55 9.35,13.55 9.35,13.5 9.4,13.5 9.4,13.4 9.45,13.4 9.45,11.47 | 9.45,11.47 9.45,11.45 | 9.45,11.47 9.49,11.47 9.49,11.45 | v7.5,11.45 9.45,11.45 | 9.45,11.45 9.49,11.45
  Bottom 0.076: R101.2 1,11.95 2.5,11.95 2.5,11.9 2.6,11.9 2.6,11.85 2.65,11.85 2.65,11.8 2.7,11.8 2.7,11.75 2.75,11.75 2.75,11.6 2.8,11.6 2.8,11.45 v7.5,11.45 | 22.2,8.1 22.35,8.1 22.35,8.15 22.45,8.15 22.45,8.2 22.6,8.2 22.6,8.25 22.75,8.25 22.75,8.3 22.9,8.3 22.9,8.35 23,8.35 23,8.4 23.15,8.4 23.15,8.45 23.3,8.45 23.3,8.5 23.45,8.5 23.45,8.55 23.55,8.55 23.55,8.6 23.7,8.6 23.7,8.65 23.85,8.65 23.85,8.7 24,8.7 24,8.75 24.15,8.75 24.15,8.8 24.25,8.8 24.25,8.85 24.4,8.85 24.4,8.9 24.55,8.9 24.55,8.95 24.7,8.95 24.7,9 24.8,9 24.8,9.05 24.95,9.05 24.95,9.1 25.1,9.1 25.1,9.15 25.25,9.15 25.25,9.2 25.4,9.2 25.4,9.25 25.5,9.25 25.5,9.3 25.65,9.3 25.65,9.35 25.75,9.35 v25.75,9.45 | U10.3 v9.15,14.6
EE-DATA-DO  (via drill 0.2 pad 0.3)
  Route2 0.1: v2.24,12.98 3.95,13.3 v6.03,12.98 9.1,13 v9.11,13.3
  Bottom 0.1: R101.1 v2.24,12.98 | R97.1 v6.03,12.98 | U10.4 v9.11,13.3
EN_BIAS  (via drill 0.2 pad 0.3)
  Top 0.076: R70.2 16.85,4 19.5,4 19.5,3.95 19.65,3.95 19.65,3.9 19.75,3.9 19.75,3.85 19.8,3.85 19.8,3.8 19.85,3.8 19.85,3.75 19.9,3.75 19.9,3.7 19.95,3.7 19.95,3.6 20,3.6 20,3.5 20.05,3.5 20.05,3.35 20.1,3.35 20.1,2.82 | 20.1,2.82 20.1,2.3 20.05,2.3 20.05,2.25 20,2.25 20,2.2 v17.75,2.2 | R75.1 2.5,2.6 v1.75,2.6 | R76.1 20.1,2.85 R76.1 | 20.1,2.82 20.12,2.82 R76.1
  Route2 0.076: v16.95,2.6 17.55,2.6 17.55,2.55 17.6,2.55 17.6,2.5 17.65,2.5 17.65,2.2 v17.75,2.2 | v17.3,5.75 17.2,5.75 17.2,5.85 17.15,5.85 17.15,5.9 17.1,5.9 17.1,5.95 10.65,5.95 10.65,6.2 | 10.65,6.21 v10.65,7.05 | v10.3,6.2 10.63,6.2 | 10.63,6.2 10.65,6.2 | v1.75,2.6 4.4,2.6 4.4,2.65 4.45,2.65 4.45,2.8 4.5,2.8 4.5,2.85 4.6,2.85 4.6,2.9 5.25,2.9 5.25,2.95 5.35,2.95 5.35,3 5.45,3 5.45,3.05 5.55,3.05 5.55,3.1 5.65,3.1 5.65,3.15 5.75,3.15 5.75,3.2 5.85,3.2 5.85,3.25 5.95,3.25 5.95,3.3 6,3.3 6,3.35 6.1,3.35 6.1,3.4 6.2,3.4 6.2,3.45 6.3,3.45 6.3,3.5 6.4,3.5 6.4,3.55 6.5,3.55 6.5,3.6 6.55,3.6 v6.55,3.8 | 10.63,6.2 10.63,6.21 10.65,6.21 | 10.65,6.2 10.65,6.21